# Altium PCB KOSVT-1.PcbDoc (part 1 of 2)
Units mm, origin at the board's own origin, x right, y up, seen from the top; angles counter-clockwise.
Board outline 70 x 45 mm, 4 copper layers (Top Layer, Layer 1, Layer 2, Bottom Layer), stack 1.051 mm thick; 90 components, 60 nets, 303 pads, 297 vias.
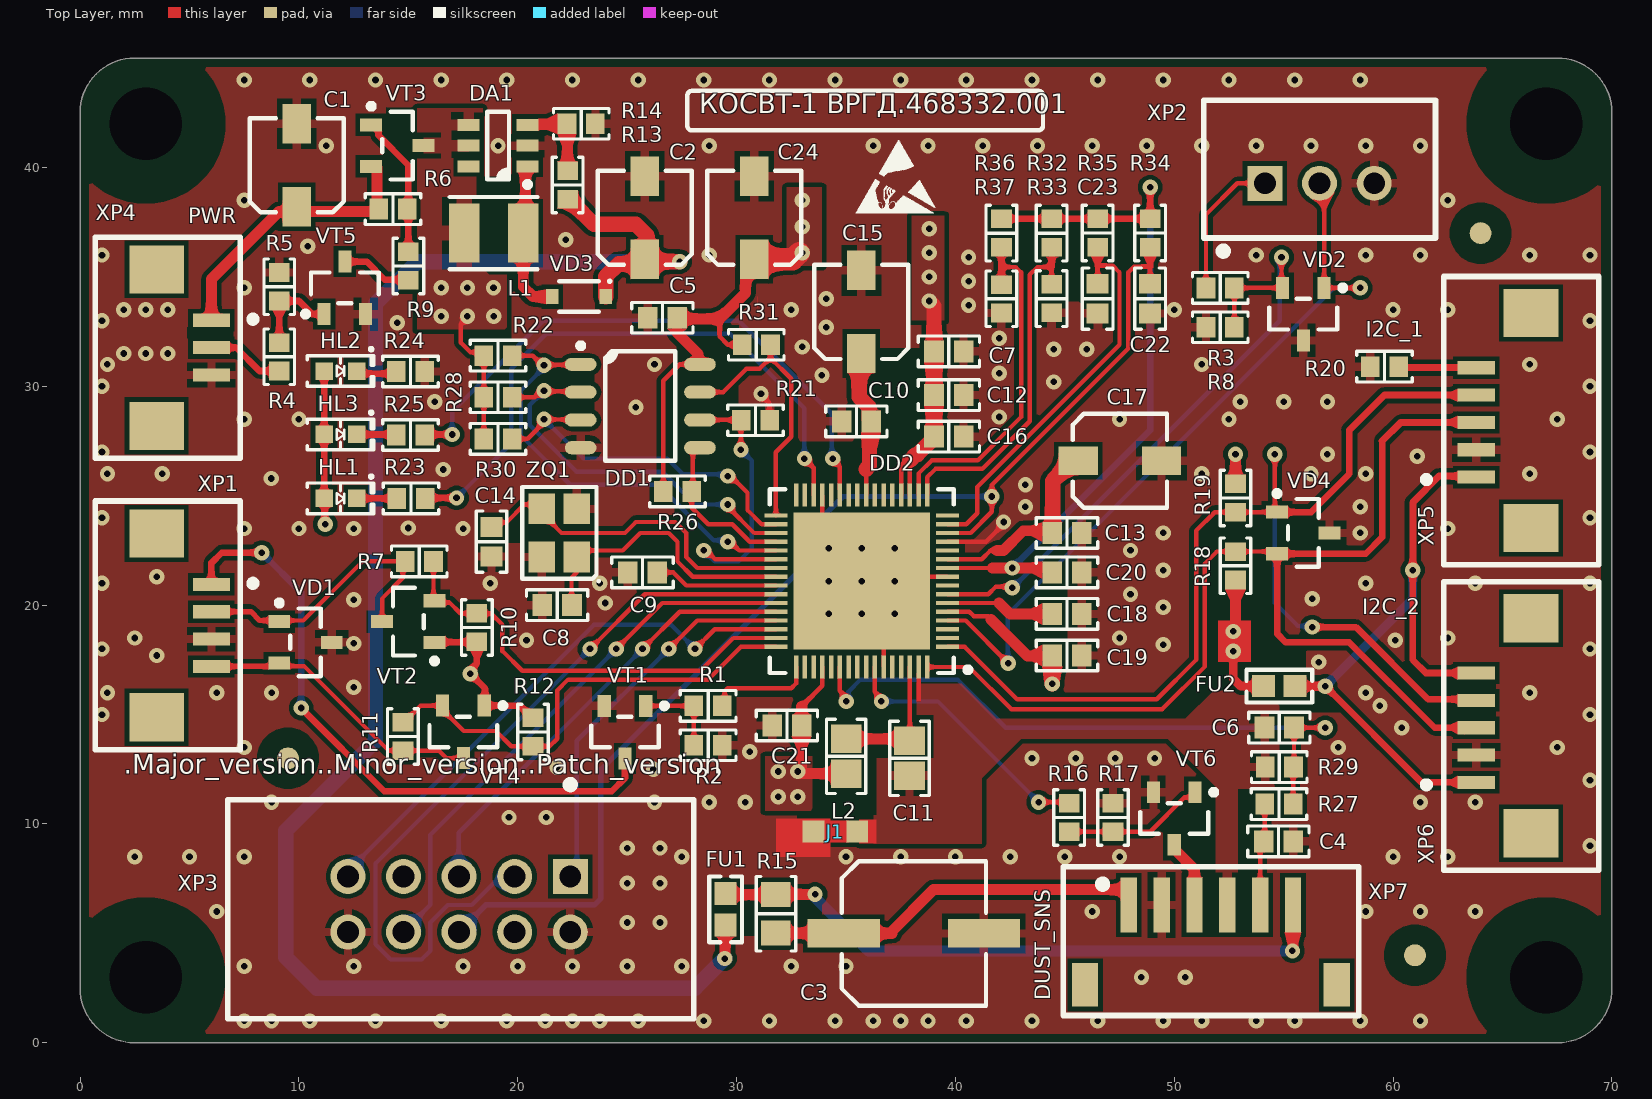
[diagram p0: Top Layer view]
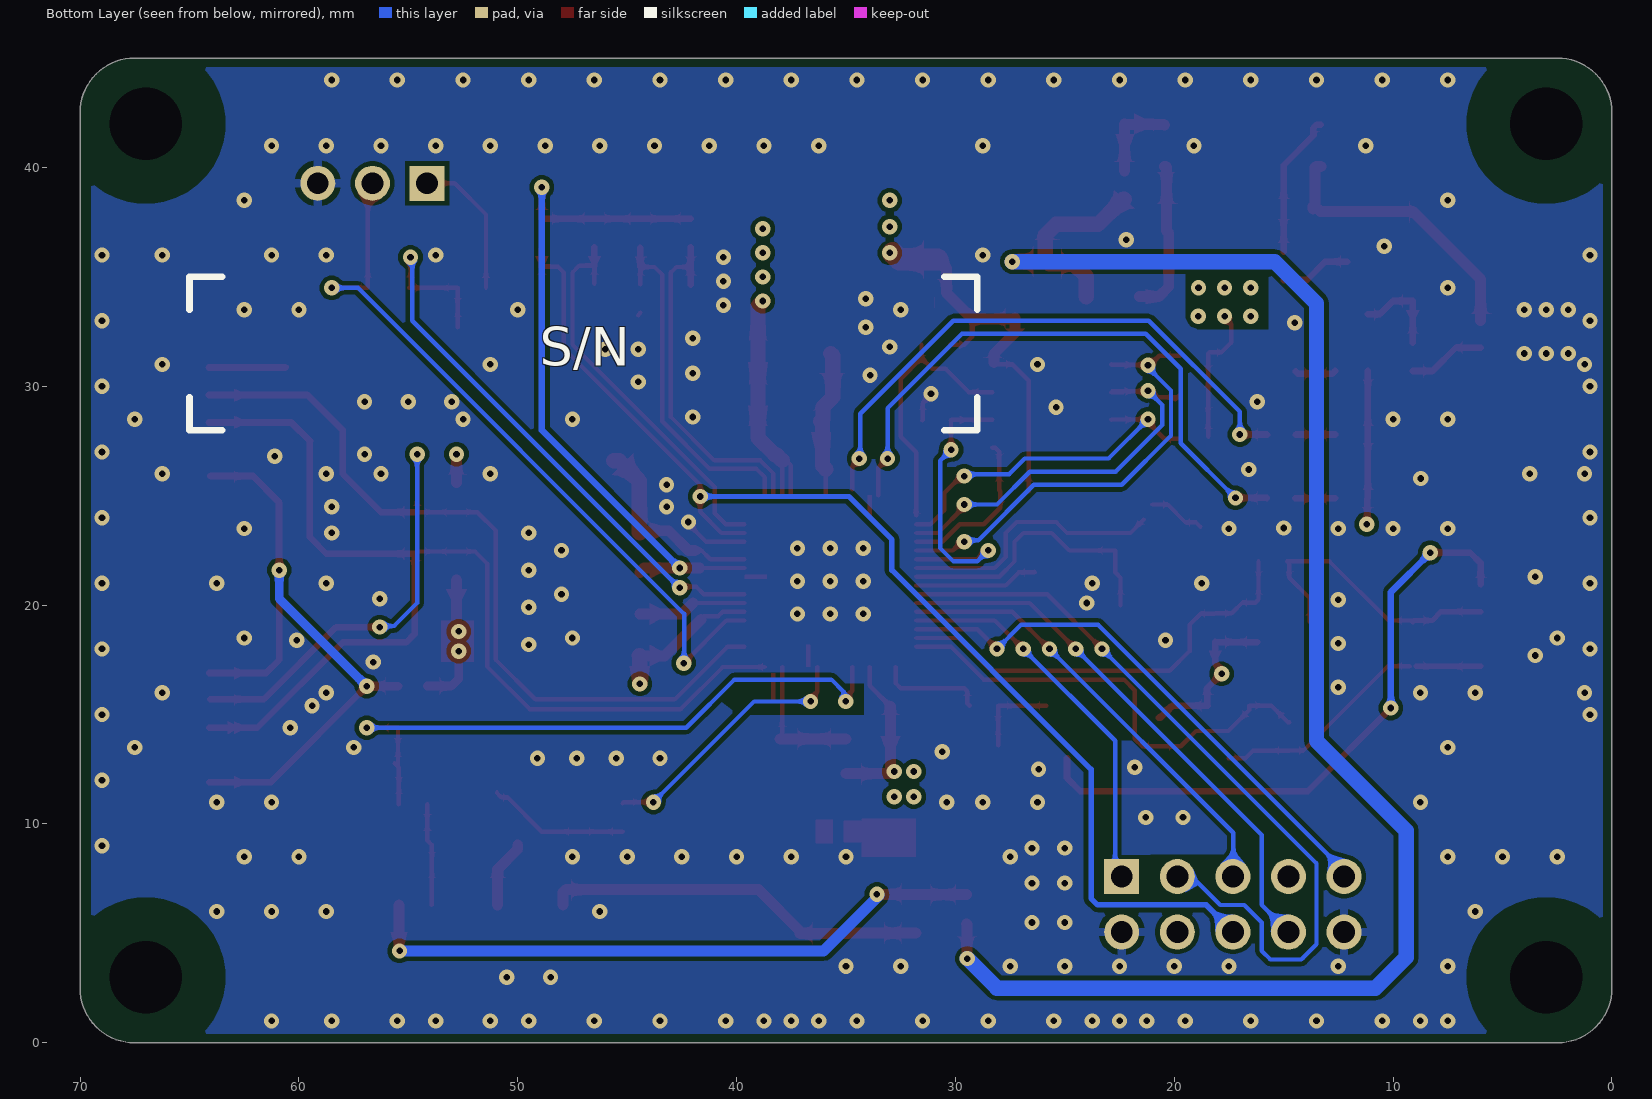
[diagram p1: Bottom Layer view, seen from below]
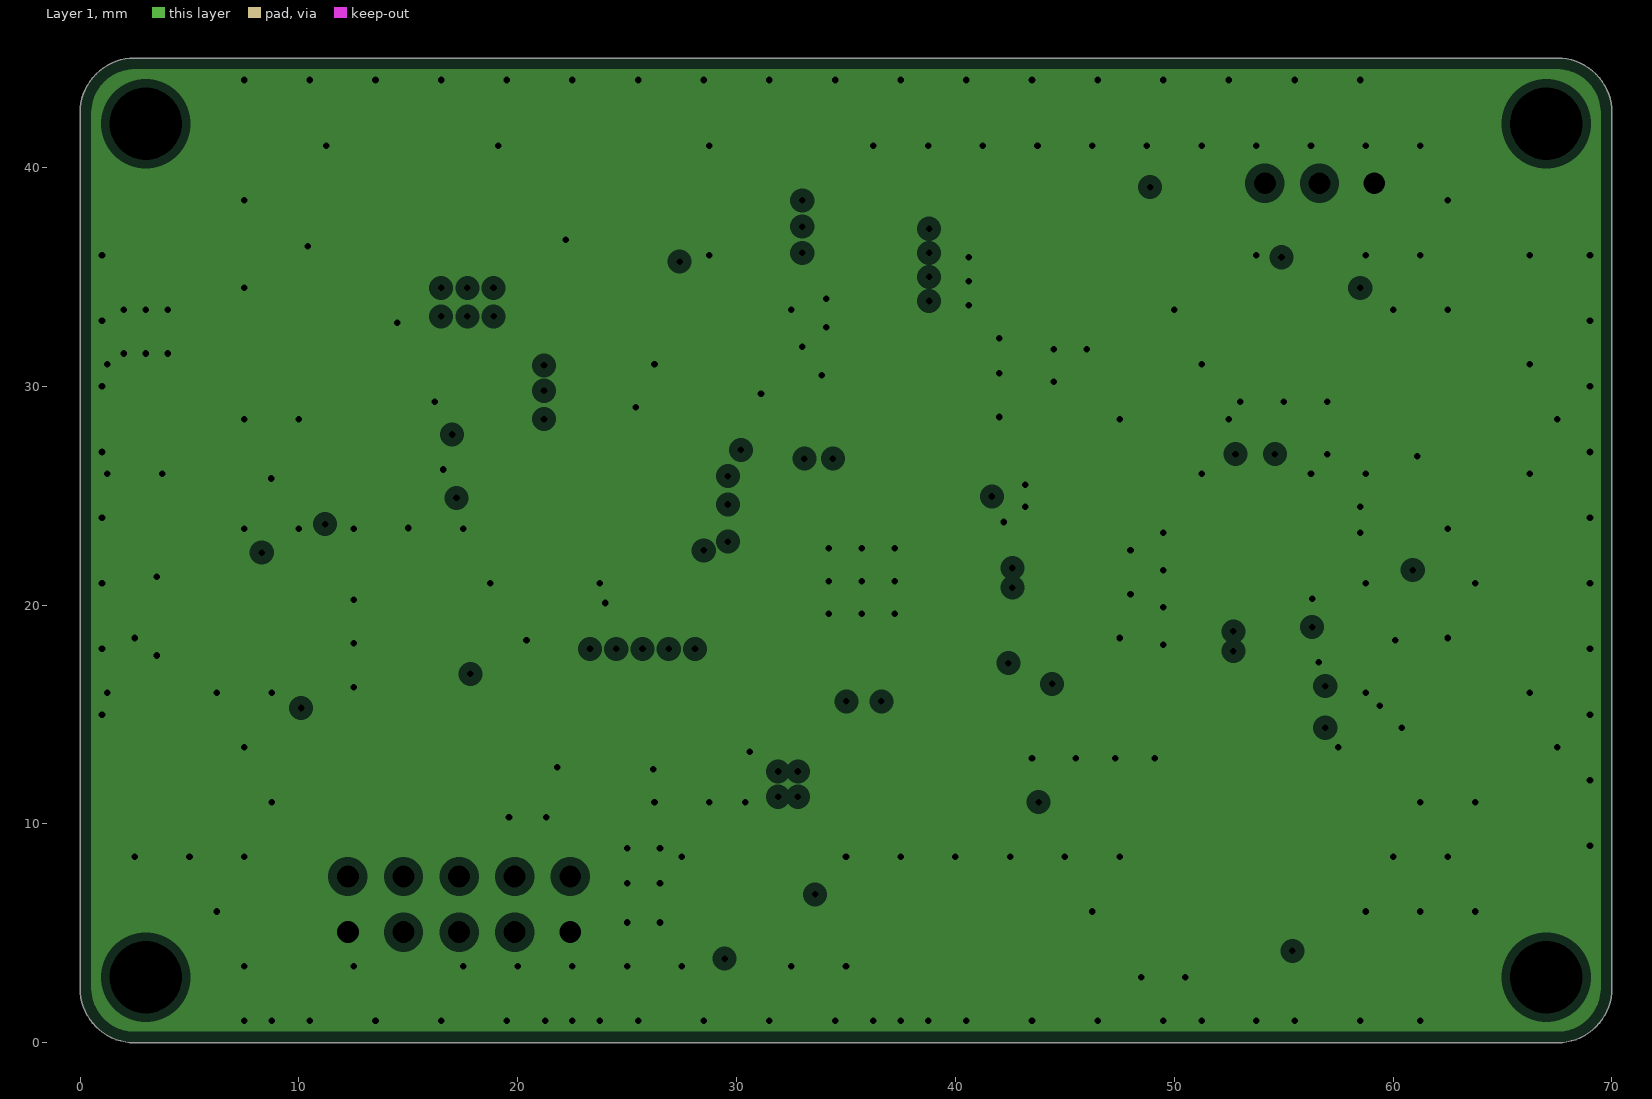
[diagram p2: Layer 1, clearances drawn from the general rule]
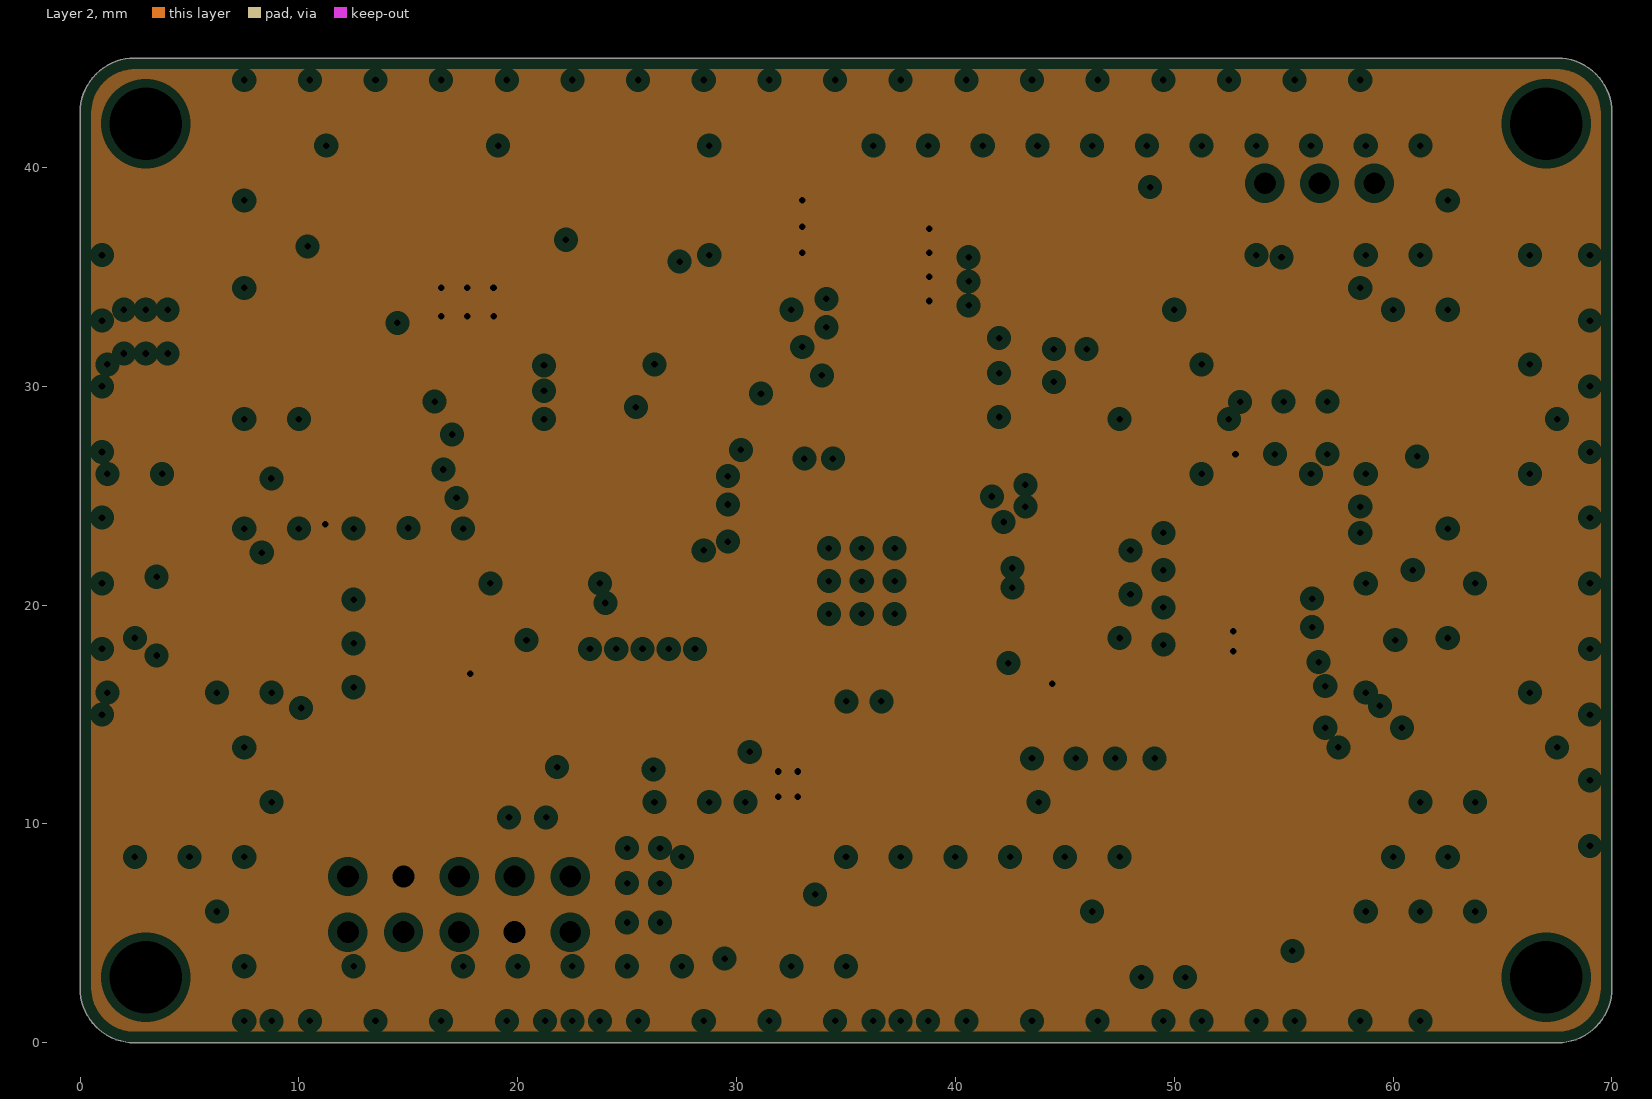
[diagram p3: Layer 2, clearances drawn from the general rule]
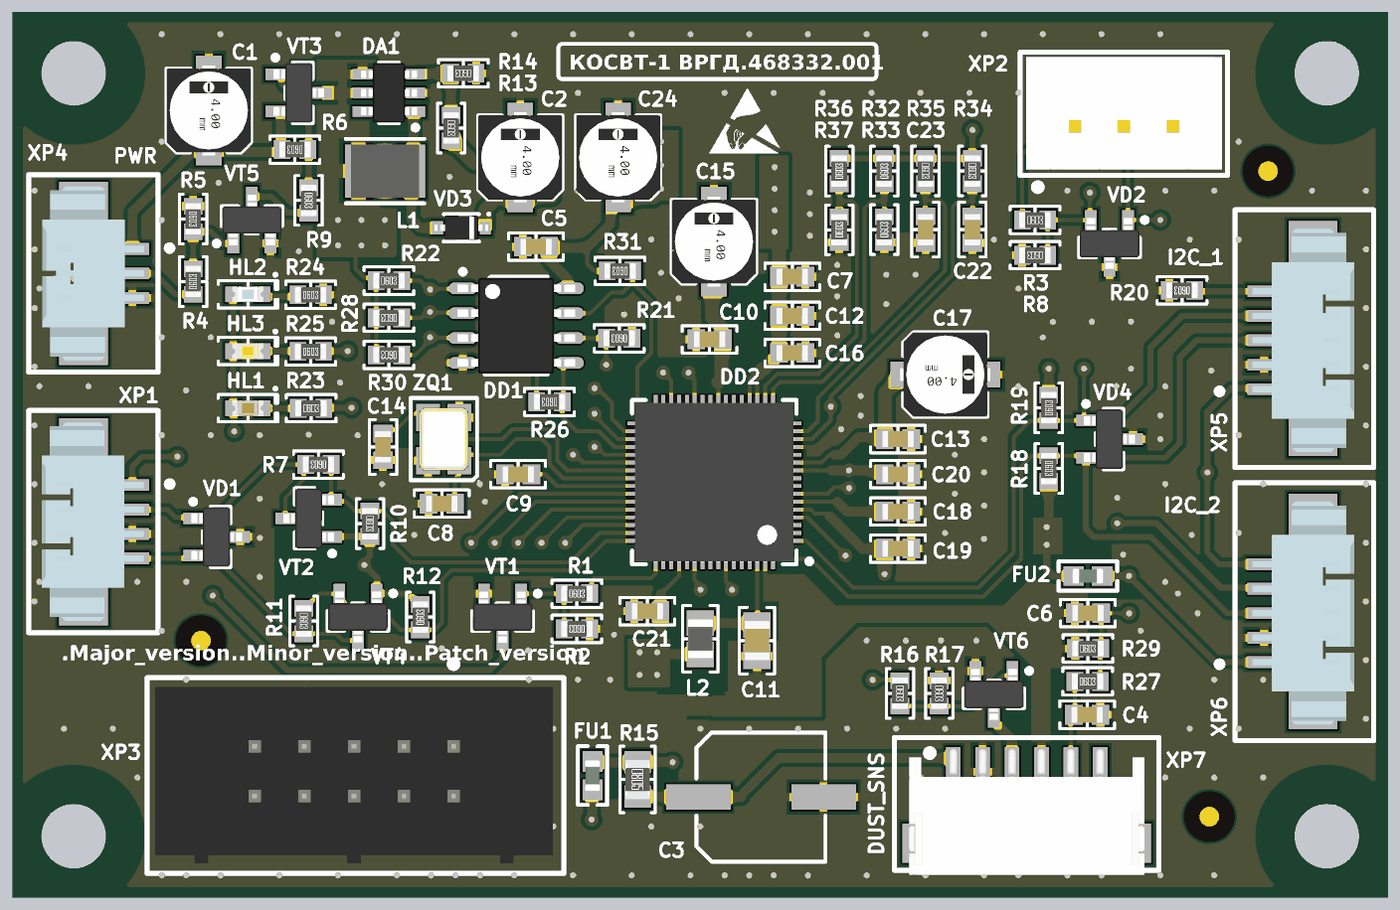
[diagram p4: 3D render of the assembled board from above, using the file's embedded part models]

## Layer stack, top to bottom
Top Solder: solder mask 0.0254, SM-001, Dk 4
Top Layer: signal copper 0.038
Dielectric 4: prepreg 0.115, FR4, Dk 4.2
Layer 1: plane copper 0.0175, net GND
Dielectric 1: core 0.71, FR4, Dk 4.6
Layer 2: plane copper 0.0175, net +3V3
Dielectric 5: prepreg 0.115, FR4, Dk 4.2
Bottom Layer: signal copper 0.038
Bottom Solder: solder mask 0.0254, SM-001, Dk 4

## Board outline
2.5,0 cw(c2.5,2.5) 0,2.5 0,42.5 cw(c2.5,42.5) 2.5,45 67.5,45 cw(c67.5,42.5) 70,42.5 70,2.5 cw(c67.5,2.5) 67.5,0

## Design rules (kind name [scope] priority, off if disabled: settings)
BoardOutlineClearance [All] p1: gap=0.4 ignorepadtopadclearanceinfootprint=FALSE
Clearance Clearance_RP [Name = 'Free-RP'] p1: gap=0.9 ignorepadtopadclearanceinfootprint=FALSE
Clearance Clearance_MH [Name = 'Free-MH'] p2: gap=2 ignorepadtopadclearanceinfootprint=FALSE
Clearance [All] p3: gap=0.2 ignorepadtopadclearanceinfootprint=FALSE
ComponentClearance [All] p1: gap=0.5 collisioncheckmode=3 verticalgap=0.254 showdistances=FALSE
HoleSize [All] p1: absolutevalues=TRUE maxlimit=5 minlimit=0.025 maxpercent=80.000 minpercent=20.000
MinimumSolderMaskSliver [All] p1: minsoldermaskwidth=0.05
PlaneClearance [Name = 'Free-MH'] p1: clearance=2
PlaneClearance PlaneClearance_All [All] p2: clearance=0.4
PlaneConnect [All] p1: pad.planeconnectstyle=Relief pad.reliefexpansion=0.508 pad.reliefentries=4 pad.reliefconductorwidth=0.254 pad.reliefairgap=0.254 via.planeconnectstyle=Direct via.reliefexpansion=0.508 via.reliefentries=4 via.reliefconductorwidth=0.254 via.reliefairgap=0.254
PolygonConnect PolygonConnect_3V3_1 [InNet('+3V3') vs InComponent('DA1')] p1: thpad.connectstyle=Relief thpad.reliefconductorwidth=0.5 thpad.reliefentries=4 thpad.polygonreliefangle="90 Angle" thpad.airgapwidth=0.3 smdpad.connectstyle=Relief smdpad.reliefconductorwidth=0.5 smdpad.reliefentries=4 smdpad.polygonreliefangle="90 Angle" smdpad.airgapwidth=0.3 via.connectstyle=Direct via.reliefconductorwidth=0.254 via.reliefentries=4 via.polygonreliefangle="90 Angle" via.airgapwidth=0.254
PolygonConnect PolygonConnect_3V3 [InNet('+3V3')] p2: thpad.connectstyle=Relief thpad.reliefconductorwidth=0.5 thpad.reliefentries=4 thpad.polygonreliefangle="90 Angle" thpad.airgapwidth=0.3 smdpad.connectstyle=Relief smdpad.reliefconductorwidth=0.7 smdpad.reliefentries=4 smdpad.polygonreliefangle="90 Angle" smdpad.airgapwidth=0.3 via.connectstyle=Direct via.reliefconductorwidth=0.254 via.reliefentries=4 via.polygonreliefangle="90 Angle" via.airgapwidth=0.254
PolygonConnect PolygonConnect_AGND [InNet('AGND')] p3: thpad.connectstyle=Relief thpad.reliefconductorwidth=0.4 thpad.reliefentries=4 thpad.polygonreliefangle="90 Angle" thpad.airgapwidth=0.25 smdpad.connectstyle=Relief smdpad.reliefconductorwidth=0.4 smdpad.reliefentries=4 smdpad.polygonreliefangle="90 Angle" smdpad.airgapwidth=0.25 via.connectstyle=Direct via.reliefconductorwidth=0.254 via.reliefentries=4 via.polygonreliefangle="90 Angle" via.airgapwidth=0.254
PolygonConnect [All] p4: thpad.connectstyle=Relief thpad.reliefconductorwidth=0.4 thpad.reliefentries=4 thpad.polygonreliefangle="90 Angle" thpad.airgapwidth=0.25 smdpad.connectstyle=Relief smdpad.reliefconductorwidth=0.4 smdpad.reliefentries=4 smdpad.polygonreliefangle="90 Angle" smdpad.airgapwidth=0.25 via.connectstyle=Direct via.reliefconductorwidth=0.254 via.reliefentries=4 via.polygonreliefangle="90 Angle" via.airgapwidth=0.254
RoutingVias [All] p1: holewidth=0.3 width=1.2 viastyle="Through Hole" minholewidth=0.2 minwidth=0.6 maxholewidth=0.5 maxwidth=1
SilkToSilkClearance [All] p1: silktosilkclearance=0.2
SilkToSolderMaskClearance [IsPad] p1: minsilkscreentomaskgap=0.05 clearancetoexposedcopper=TRUE
SolderMaskExpansion [All] p1: expansion=0.102 istentingtop=FALSE
SupplyNets "Schematic Supply Nets_6" [InNet('VCC_BU')] p1: voltage=0.000
SupplyNets "Schematic Supply Nets_5" [InNet('GND')] p2: voltage=0.000
SupplyNets "Schematic Supply Nets_4" [InNet('+5V_Fus')] p3: voltage=0.000
SupplyNets "Schematic Supply Nets_3" [InNet('AGND')] p4: voltage=0.000
SupplyNets "Schematic Supply Nets_2" [InNet('+3V3_Fus')] p5: voltage=0.000
SupplyNets "Schematic Supply Nets_1" [InNet('+3V3')] p6: voltage=0.000
SupplyNets "Schematic Supply Nets" [InNet('+5V')] p7: voltage=0.000
Width [All] p1: maxlimit=1 minlimit=0.15 preferedwidth=0.2
23 further rules are at their usual default settings.

## Classes and differential pairs
component class MCU: C5 C6 C7 C8 C9 C10 C11 C12 C13 C14 C15 C16 C17 C18 C19 C20 C21 C22 C23 C24 DD1 DD2 HL1 HL2 HL3 J1 L2 R21 R22 R23 R24 R25 R26 R27 R28 R29 R30 R31 R32 R33 R34 R35 R36 R37 ZQ1
component class MAIN: C1 C2 C3 C4 DA1 FU1 FU2 L1 R1 R2 R3 R4 R5 R6 R7 R8 R9 R10 R11 R12 R13 R14 R15 R16 R17 R18 R19 R20 VD1 VD2 VD3 VD4 VT1 VT2 VT3 VT4 VT5 VT6 XP1 XP2 XP3 XP4 XP5 XP6 XP7

## Components (designator, comment, footprint, x,y, rotation, side; value= is the part's Value field where it differs from the comment)
C1 "10uF" "CAP ALSMD ELEC 4.3MM H5.4MM" 9.9,40.101 r90 top
C2 "22uF" "CAP ALSMD ELEC 4.3MM H5.4MM" 25.806,37.7 r90 top
C3 "220uF" "CAP ALSMD ELEC 6.6MM H7.7MM" 38.1,5 r0 top
C4 "10nF" "CAP 0603_1608" 54.76,9.206 r180 top
C5 "0.1uF" "CAP 0603_1608" 26.612,33.134 r0 top
C6 "10nF" "CAP 0603_1608" 54.8,14.404 r0 top
C7 "0.1uF" "CAP 0603_1608" 39.7,31.6 r180 top
C8 "10pF" "CAP 0603_1608" 21.8,20 r0 top
C9 "0.1uF" "CAP 0603_1608" 25.7,21.5 r0 top
C10 "0.1uF" "CAP 0603_1608" 35.475,28.4 r0 top
C11 "1uF" "CAP 0805_2012" 37.9,13 r90 top
C12 "0.1uF" "CAP 0603_1608" 39.7,29.6 r180 top
C13 "0.1uF" "CAP 0603_1608" 45.1,23.3 r180 top
C14 "10pF" "CAP 0603_1608" 18.8,22.9 r90 top
C15 "2.2uF" "CAP ALSMD ELEC 4.3MM H5.4MM" 35.7,33.4 r90 top
C16 "0.1uF" "CAP 0603_1608" 39.7,27.7 r180 top
C17 "2.2uF" "CAP ALSMD ELEC 4.3MM H5.4MM" 47.518,26.6 r0 top
C18 "0.1uF" "CAP 0603_1608" 45.1,19.6 r180 top
C19 "0.1uF" "CAP 0603_1608" 45.1,17.7 r180 top
C20 "0.1uF" "CAP 0603_1608" 45.1,21.5 r180 top
C21 "0.1uF" "CAP 0603_1608" 32.3,14.5 r0 top
C22 "0.1uF" "CAP 0603_1608" 48.9,34.006 r90 top
C23 "0.1uF" "CAP 0603_1608" 46.5,34.006 r90 top
C24 "10uF" "CAP ALSMD ELEC 4.3MM H5.4MM" 30.806,37.7 r90 top
DA1 "MT3608 AEROSEMI" "TI SOT-23-6 DBV" 19.1,41 r180 top
DD1 "W25Q16JVSNIQ" "WINBOND SOIC-8" 25.6,29.1 r0 top
DD2 "К1948ВК018 АДКБ.431290.418ТУ" QFN40P800X800X76_HS-65M 35.718,21.1 r180 top
FU1 "BSMD0603-010-15V BHFUSE" "FUSE 0603_1608 0.8MM" 29.5,6.1 r90 top
FU2 "BSMD0603-010-15V BHFUSE" "FUSE 0603_1608 0.8MM" 54.8,16.3 r0 top
HL1 "KP-1608SURC" "LED 0603_1608 RED" 11.9,24.878 r0 top
HL2 "KPH-1608MGC" "LED 0603_1608 GREEN" 11.9,30.7 r0 top
HL3 "KPH-1608SYC" "LED 0603_1608 YELLOW" 11.9,27.8 r0 top
J1 "=Value" NET_TIE_1MM 35.516,9.654 r180 top net-tie
L1 "10uH" "MURATA LQH32CN" 18.9,37 r0 top
L2 "220ohm 100MHz" "FER 0805_2012" 35.004,13.091 r270 top
R1 "1.2k" "RES 0603_1608"#1 28.7,15.4 r0 top
R2 "10k" "RES 0603_1608"#1 28.7,13.6 r180 top
R3 "1.2k" "RES 0603_1608"#1 52.1,34.5 r0 top
R4 "1.2k" "RES 0603_1608"#1 9.1,31.35 r90 top
R5 "10k" "RES 0603_1608"#1 9.1,34.55 r270 top
R6 "10k" "RES 0603_1608"#1 14.3,38.1 r180 top
R7 "0" "RES 0603_1608"#1 15.5,22 r180 top
R8 "2k" "RES 0603_1608"#1 52.1,32.7 r180 top
R9 "10" "RES 0603_1608"#1 15,35.5 r270 top
R10 "4.7k" "RES 0603_1608"#1 18.13,18.978 r270 top
R11 "0" "RES 0603_1608"#1 14.75,14 r270 top
R12 "4.7k" "RES 0603_1608"#1 20.7,14.2 r90 top
R13 "11k" "RES 0603_1608"#1 22.28,39.2 r270 top
R14 "1.5k" "RES 0603_1608"#1 22.9,42 r180 top
R15 "150" "RES 0805_2012" 31.8,5.9 r270 top
R16 "10" "RES 0603_1608"#1 45.2,10.3 r270 top
R17 "" "RES 0603_1608"#1 47.204,10.3 r270 top value=10k
R18 "4.7k" "RES 0603_1608"#1 52.8,21.8 r270 top
R19 "4.7k" "RES 0603_1608"#1 52.8,24.9 r90 top
R20 "10k" "RES 0603_1608"#1 59.606,30.9 r180 top
R21 "10k" "RES 0603_1608"#1 30.863,28.451 r180 top
R22 "10k" "RES 0603_1608"#1 19.1,31.4 r0 top
R23 "470" "RES 0603_1608"#2 15.124,24.878 r0 top
R24 "470" "RES 0603_1608"#2 15.102,30.678 r0 top
R25 "470" "RES 0603_1608"#2 15.102,27.778 r0 top
R26 "10k" "RES 0603_1608"#1 27.3,25.2 r180 top
R27 "4.7k" "RES 0603_1608"#1 54.785,10.91 r0 top
R28 "10k" "RES 0603_1608"#1 19.1,29.5 r180 top
R29 "1.2k" "RES 0603_1608"#1 54.8,12.6 r0 top
R30 "10k" "RES 0603_1608"#1 19.1,27.6 r180 top
R31 "10k" "RES 0603_1608"#1 30.9,31.9 r180 top
R32 "10k" "RES 0603_1608"#1 44.4,37 r90 top
R33 "10k" "RES 0603_1608"#1 44.4,34.006 r90 top
R34 "10k" "RES 0603_1608"#1 48.9,37.006 r270 top
R35 "10k" "RES 0603_1608"#1 46.5,37.006 r270 top
R36 "10k" "RES 0603_1608"#1 42.1,37 r90 top
R37 "10k" "RES 0603_1608"#1 42.1,34 r90 top
VD1 "PESD5V0U1UT" "SOT-23-3 N" 10.3,18.3 r0 top
VD2 "PESD5V0U1UT" "SOT-23-3 N" 55.9,33.3 r270 top
VD3 "1N5817WS Hottech" "MCC SOD-323" 22.8,34.1 r0 top
VD4 "PESD5V0U1UT" "SOT-23-3 N" 55.9,23.3 r0 top
VT1 "КТ229Б9" "SOT-23-3 N" 24.9,14.2 r270 top
VT2 "КП526А9" "SOT-23-3 N" 15,19.25 r180 top
VT3 "AO3401 Hottech" "SOT-23-3 N" 14.5,41 r0 top
VT4 "КП526А9" "SOT-23-3 N" 17.519,14.208 r270 top
VT5 "КТ229Б9" "SOT-23-3 N" 12.1,34.5 r90 top
VT6 "КП526А9" "SOT-23-3 N" 50,10.25 r270 top
XP1 "DS1020-02-04MVT1R" DS1020-02-04MVT1R 6,20.95 r270 top locked
XP2 "DS1069-3MVW6X" CONNFLY_DS1069-3M 54.139,39.279 r0 top
XP3 "DS1013-10S" DS1013-10S 22.4,7.6 r0 top
XP4 "DS1020-02-03MVT1R" DS1020-02-03MVT1R 6,33.018 r270 top locked
XP5 "DS1020-02-05MVT1R" DS1020-02-05MVT1R 63.8,25.85 r90 top
XP6 "DS1020-02-05MVT1R" DS1020-02-05MVT1R 63.8,11.9 r90 top
XP7 "S6B-ZR-SM4A-TF" "JST S6B-ZR-SM4A-TF" 57.425,2.65 r180 top
ZQ1 "32MHz" XTAL3225X07N 21.9,23.3 r90 top

## Footprints (in the part's own frame and the unit in brackets; to place one, negate y for a bottom-side part, rotate by r counter-clockwise, add the part's x,y. Pads: shape width x height; smd on the part's side, far side on the other; paste and mask are expansions set on the pad)
"CAP 0603_1608" [mm] "Chip Capacitor, 2-Leads, Body 1.60x0.80mm, IPC Medium Density"
  rect 0.9x1 smd: 1(-0.675,0) 2(0.675,0)
  silkscreen extent -1.4,-0.7 1.4,0.7, body extent -0.8,-0.41 0.8,0.41, height 0.82
"CAP 0805_2012" [mm] "Chip Capacitor, 2-Leads, Body 2.00x1.20mm, IPC Medium Density"
  rect 1.3x1.4 smd: 1(-0.8,0) 2(0.8,0)
  silkscreen extent -1.7,-0.9 1.7,0.9, body extent -1,-0.64 1,0.64, height 1.26
"CAP ALSMD ELEC 4.3MM H5.4MM" [mm] "Aluminum SMD Electrolytic Capacitor, 4.30mm Land Size, 4.00mm Diameter, 5.40mm Height, 4.60mm Maximum Leads Span"
  rect 1.8x1.3 smd: 1(-1.9,0) 2(1.9,0)
  silkscreen extent -2.15,-2.15 2.15,2.15, body extent -2.3,-2.15 2.3,2.15, height 5.4
"CAP ALSMD ELEC 6.6MM H7.7MM" [mm] "Aluminum SMD Electrolytic Capacitor, 6.60mm Land Size, 6.30mm Diameter, 7.70mm Height, 8.00mm Maximum Leads Span"
  rect 3.3x1.3 smd: 1(-3.2,0) 2(3.2,0)
  silkscreen extent -3.3,-3.3 3.3,3.3, body extent -4,-3.3 4,3.3, height 7.7
CONNFLY_DS1069-3M [mm]
  rect 1.6x1.6 hole 1: 1(0,0)
  round 1.6 hole 1: 2(2.5,0) 3(5,0)
  silkscreen extent -2.8,-3.25 7.8,3.8, body extent -2.5,-2.2 7.5,3.55, height 7
DS1013-10S [mm]
  rect 1.6x1.6 hole 1: 1(0,0)
  round 1.6 hole 1: 2(0,-2.54) 3(-2.54,0) 4(-2.54,-2.54) 5(-5.08,0) 6(-5.08,-2.54) 7(-7.62,0) 8(-7.62,-2.54) 9(-10.16,0) 10(-10.16,-2.54)
  silkscreen extent -15.66,-6.5 5.64,4.35, body extent -15.23,-5.98 5.07,3.02, height 8.9
DS1020-02-03MVT1R [mm]
  rect 0.6x1.7 smd: 1(0,0) 2(1.25,0) 3(2.5,0)
  rect 2.2x2.5 smd: M(-2.325,-2.5) M(4.825,-2.5)
  silkscreen extent -3.8,-5.3 6.3,2, body extent -3.2,-4.6 5.7,0.6, height 3.4
DS1020-02-04MVT1R [mm]
  rect 0.6x1.7 smd: 1(0,0) 2(1.25,0) 3(2.5,0) 4(3.75,0)
  rect 2.2x2.5 smd: M(-2.325,-2.5) M(6.075,-2.5)
  silkscreen extent -3.81,-5.3 7.55,2, body extent -3.2,-4.62 6.95,0.58, height 3.35
DS1020-02-05MVT1R [mm]
  rect 0.6x1.7 smd: 1(0,0) 2(1.25,0) 3(2.5,0) 4(3.75,0) 5(5,0)
  rect 2.2x2.5 smd: M(-2.325,-2.5) M(7.5,-2.5)
  silkscreen extent -4.01,-5.6 9.17,2.38, body extent -3.2,-4.6 8.2,0.6, height 3.35
"FER 0805_2012" [mm] "Chip Ferrite, 2-Leads, Body 2.00x1.20mm, IPC Medium Density"
  rect 1.3x1.4 smd: 1(-0.8,0) 2(0.8,0)
  silkscreen extent -1.7,-0.9 1.7,0.9, body extent -1,-0.64 1,0.64, height 1.26
"FUSE 0603_1608 0.8MM" [mm] "Chip Fuse 1.5A AC 32V DC, 2-Leads, Body 1.60x0.80mm, IPC Medium Density"
  rect 1.05x1 smd: 1(-0.725,0) 2(0.725,0)
  silkscreen extent -1.5,-0.75 1.5,0.75, body extent -0.8,-0.4 0.8,0.4, height 0.95
"JST S6B-ZR-SM4A-TF" [mm]
  rect 0.75x2.5 smd: 1(9.5,-3.65) 2(8,-3.65) 3(6.5,-3.65) 4(5,-3.65) 5(3.5,-3.65) 6(2,-3.65)
  rect 1.2x2 smd: M(0,0) M(11.5,0)
  silkscreen extent -1,-5.4 12.5,1.4, body extent -0.25,-4.88 11.75,1.62, height 3.7
"LED 0603_1608 GREEN" [mm] "Chip Diode, 2-Leads, Body 1.60x0.80mm, IPC Medium Density"
  rect 0.8x0.8 smd: 1(-0.75,0) 2(0.75,0)
  silkscreen extent -1.52,-0.7 1.52,1.05, body extent -0.8,-0.4 0.8,0.4, height 0.53
"LED 0603_1608 RED" [mm] "Chip Diode, 2-Leads, Body 1.60x0.80mm, IPC Medium Density"
  rect 0.8x0.8 smd: 1(-0.75,0) 2(0.75,0)
  silkscreen extent -1.52,-0.7 1.52,1.05, body extent -0.8,-0.4 0.8,0.4, height 0.53
"LED 0603_1608 YELLOW" [mm] "Chip Diode, 2-Leads, Body 1.60x0.80mm, IPC Medium Density"
  rect 0.8x0.8 smd: 1(-0.75,0) 2(0.75,0)
  silkscreen extent -1.52,-0.7 1.52,1.05, body extent -0.8,-0.4 0.8,0.4, height 0.53
"MCC SOD-323" [mm] "SOD-323, 2-Leads, Body 1.70x1.25mm"
  rect 0.56x0.69 smd: 1(-1.22,0) 2(1.22,0)
  silkscreen extent -0.9,-0.7 1.45,0.75, body extent -1.36,-0.63 1.36,0.63, height 1.2
"MURATA LQH32CN" [mm]
  rect 1.4x2.7 smd: 1(-1.35,0) 2(1.35,0)
  silkscreen extent -2,-1.65 2,1.65, body extent -1.75,-1.45 1.75,1.45, height 2.21
NET_TIE_1MM [mm]
  rect 1x1 smd paste-2539.97 mask-2539.97: 1(0,0)
  rect 1x1 smd paste-2539.97 mask+0.102: 2(2,0)
  Top Layer region: 0.4,-0.5 1.6,-0.5 1.6,0.5 0.4,0.5
QFN40P800X800X76_HS-65M [mm] "QFN, 64-Leads, Body 8,00x8,00mm, Pitch 0,40mm, Thermal Pad 6,25x6,25mm, IPC Low Density"
  rect 1.05x0.2 smd: 1(-3.925,3) 2(-3.925,2.6) 3(-3.925,2.2) 4(-3.925,1.8) 5(-3.925,1.4) 6(-3.925,1) 7(-3.925,0.6) 8(-3.925,0.2) 9(-3.925,-0.2) 10(-3.925,-0.6) 11(-3.925,-1) 12(-3.925,-1.4) 13(-3.925,-1.8) 14(-3.925,-2.2) 15(-3.925,-2.6) 16(-3.925,-3) 33(3.925,-3) 34(3.925,-2.6) 35(3.925,-2.2) 36(3.925,-1.8) 37(3.925,-1.4) 38(3.925,-1) 39(3.925,-0.6) 40(3.925,-0.2) 41(3.925,0.2) 42(3.925,0.6) 43(3.925,1) 44(3.925,1.4) 45(3.925,1.8) 46(3.925,2.2) 47(3.925,2.6) 48(3.925,3)
  rect 0.2x1.05 smd: 17(-3,-3.925) 18(-2.6,-3.925) 19(-2.2,-3.925) 20(-1.8,-3.925) 21(-1.4,-3.925) 22(-1,-3.925) 23(-0.6,-3.925) 24(-0.2,-3.925) 25(0.2,-3.925) 26(0.6,-3.925) 29(1.8,-3.925) 31(2.6,-3.925) 32(3,-3.925) 49(3,3.925) 50(2.6,3.925) 51(2.2,3.925) 52(1.8,3.925) 53(1.4,3.925) 54(1,3.925) 55(0.6,3.925) 56(0.2,3.925) 57(-0.2,3.925) 58(-0.6,3.925) 59(-1,3.925) 60(-1.4,3.925) 61(-1.8,3.925) 62(-2.2,3.925) 63(-2.6,3.925) 64(-3,3.925)
  rect 0.2x1.05 smd mask+0.102: 27(1,-3.925) 28(1.4,-3.925) 30(2.2,-3.925)
  rect 6.25x6.25 smd: 65(0,0)
  silkscreen extent -4.98,-4.2 4.2,4.2, body extent -4.06,-4.06 4.06,4.06, height 0.76
"RES 0603_1608"#1 [mm] "Chip Resistor, 2-Leads, Body 1.60x0.80mm, IPC Medium Density"
  rect 0.85x0.95 smd: 1(-0.65,0) 2(0.65,0)
  silkscreen extent -1.27,-0.7 1.27,0.7, body extent -0.8,-0.4 0.8,0.4, height 0.45
"RES 0603_1608"#2 [mm] "Chip Resistor, 2-Leads, Body 1.60x0.80mm, IPC Medium Density"
  rect 0.85x0.95 smd: 1(-0.65,0)
  rect 0.85x0.95 smd mask+0.102: 2(0.65,0)
  silkscreen extent -1.27,-0.7 1.27,0.7, body extent -0.8,-0.4 0.8,0.4, height 0.45
"RES 0805_2012" [mm] "Chip Resistor, 2-Leads, Body 2.00x1.25mm, IPC Medium Density"
  rect 1.15x1.35 smd: 1(-0.875,0) 2(0.875,0)
  silkscreen extent -1.7,-0.9 1.7,0.9, body extent -1,-0.62 1,0.63, height 0.6
"SOT-23-3 N" [mm] "SOT23, 3-Leads, Body 2,93x2,45mm, Pitch 0,95mm, IPC Medium Density"
  rect 1x0.6 smd: 1(-1.2,0.95) 2(-1.2,-0.95) 3(1.2,0)
  silkscreen extent -1.32,-1.55 0.7,1.92, body extent -1.3,-1.53 1.3,1.53, height 1.11
"TI SOT-23-6 DBV" [mm] "SOT23, 6-Leads, Body 2.90x2.80mm, Pitch 0.95mm, IPC Medium Density"
  rect 1x0.55 smd: 1(-1.35,0.95) 2(-1.35,0) 3(-1.35,-0.95) 4(1.35,-0.95) 5(1.35,0) 6(1.35,0.95)
  silkscreen extent -1.48,-1.55 0.5,1.9, body extent -1.44,-1.53 1.44,1.52, height 1.45
"WINBOND SOIC-8" [mm] "SOIC, 8-Leads, Body 4.90x3.90mm, Pitch 1.27mm, IPC Medium Density"
  oval 1.45x0.6 smd: 1(-2.725,1.905) 2(-2.725,0.635) 3(-2.725,-0.635) 4(-2.725,-1.905) 5(2.725,-1.905) 6(2.725,-0.635) 7(2.725,0.635) 8(2.725,1.905)
  silkscreen extent -2.85,-2.5 1.6,2.88, body extent -3.01,-2.45 3.01,2.45, height 1.5
XTAL3225X07N [mm] "Crystal, 4-Leads, Body 2.50x3.20mm, Pitch 2.20mm, IPC Medium Density"
  rect 1.4x1.2 smd: 1(-1.1,-0.8) 2(1.1,-0.8) 3(1.1,0.8) 4(-1.1,0.8)
  silkscreen extent -2.25,-1.85 2.1,1.7, body extent -1.61,-1.26 1.61,1.26, height 0.6

## Part data
C1 C24: library part "К50-97 – 25В – 10мкФ (±20) % – ЕВАЯ.673541.054ТУ", "Конденсатор К50-97 – 25В – 10мкФ (±20) % – ЕВАЯ.673541.054ТУ", Dielectric type=Electrolytic, Manufacturer="АО Элеконд", Package="SMD D4x5.4", Tolerance="± 20%", Voltage=25V, Country=Россия, Group="Конденсаторы полярные", HelpURL=https://elecond.ru/pdf/k50-97.pdf, Manufacturer Part Number="К50-97 – 25В – 10мкФ (±20) % – ЕВАЯ.673541.054ТУ", Name="К50-97 – 25В – 10мкФ (±20) % – ЕВАЯ.673541.054ТУ", Type="Конденсатор электролитический"
C2: library part "К50-97 – 16В – 22мкФ (±20) % – ЕВАЯ.673541.054ТУ", "Конденсатор К50-97 – 16В – 22мкФ (±20) % – ЕВАЯ.673541.054ТУ", Dielectric type=Electrolytic, Manufacturer="АО Элеконд", Package="SMD D4x5.4", Tolerance="± 20%", Voltage=16V, Country=Россия, Group="Конденсаторы полярные", HelpURL=https://elecond.ru/pdf/k50-97.pdf, Manufacturer Part Number="К50-97 – 16В – 22мкФ (±20) % – ЕВАЯ.673541.054ТУ", Name="К50-97 – 16В – 22мкФ (±20) % – ЕВАЯ.673541.054ТУ", Type="Конденсатор электролитический"
C3: library part "К50-97 – 16В – 220мкФ (±20) % – ЕВАЯ.673541.054ТУ", "Конденсатор К50-97 – 16В – 220мкФ (±20) % – ЕВАЯ.673541.054ТУ", Dielectric type=Electrolytic, Manufacturer="АО Элеконд", Package="SMD D6.3x7.7", Tolerance="± 20%", Voltage=16V, Country=Россия, Group="Конденсаторы полярные", HelpURL=https://elecond.ru/pdf/k50-97.pdf, Manufacturer Part Number="К50-97 – 16В – 220мкФ (±20) % – ЕВАЯ.673541.054ТУ", Name="К50-97 – 16В – 220мкФ (±20) % – ЕВАЯ.673541.054ТУ", Type="Конденсатор электролитический"
C4 C6: library part GRM188R71E103K, "Конденсатор 0603-X7R-25В-10мкФ ± 10%", Dielectric type=X7R, Manufacturer="Murata Electronics", Package=SMD0603, Tolerance="± 10%", Voltage=25V, Country=Япония, Group=Конденсаторы, Manufacturer Part Number=GRM188R71E103K, Name=GRM188R71E103K, Type="Конденсатор керамический"
C5 C7 C9 C10 C12 C13 C16 C18 C19 C20 C21 C22 C23: library part GRM188R71E104K, "Конденсатор 0603-X7R-25В-0,1мкФ ± 10%", Dielectric type=X7R, Manufacturer="Murata Electronics", Package=SMD0603, Tolerance="± 10%", Voltage=25V, Country=Япония, Group=Конденсаторы, Manufacturer Part Number=GRM188R71E104K, Name=GRM188R71E104K, Type="Конденсатор керамический"
C8 C14: library part CC0603KRNPO9BN100, "Конденсатор 0603-C0G-50В-10пФ ± 10%", Dielectric type=C0G, Manufacturer=Yageo, Package=SMD0603, Tolerance="± 10%", Voltage=50V, Country=Тайвань, Group=Конденсаторы, Manufacturer Part Number=CC0603KRNPO9BN100, Name=CC0603KRNPO9BN100, Type="Конденсатор керамический"
C11: library part GRM21BR71E105KA99L, "Конденсатор 0805-X7R-25В-1мкФ ± 10%", Dielectric type=X7R, Manufacturer="Murata Electronics", Package=SMD0805, Tolerance="± 10%", Voltage=25V, Country=Япония, Group=Конденсаторы, Manufacturer Part Number=GRM21BR71E105KA99L, Name=GRM21BR71E105KA99L, Type="Конденсатор керамический"
C15 C17: library part "К50-97 – 50В – 2,2мкФ (±20) % – ЕВАЯ.673541.054ТУ", "Конденсатор К50-97 – 50В – 2,2мкФ (±20) % – ЕВАЯ.673541.054ТУ", Dielectric type=Electrolytic, Manufacturer="АО Элеконд", Package="SMD D4x5.4", Tolerance="± 20%", Voltage=50V, Country=Россия, Group="Конденсаторы полярные", HelpURL=https://elecond.ru/pdf/k50-97.pdf, Manufacturer Part Number="К50-97 – 50В – 2,2мкФ (±20) % – ЕВАЯ.673541.054ТУ", Name="К50-97 – 50В – 2,2мкФ (±20) % – ЕВАЯ.673541.054ТУ", Type="Конденсатор электролитический"
DA1: "Микросхема MT3608", Input Voltage="2V to 24V", Manufacturer=AEROSEMI, Max Temperature=150°С, Min Temperature=-40°С, Output Voltage="Up to 28V", Package=SOT23-6, Country=Китай, Group=Микросхемы, Manufacturer Part Number="MT3608 AEROSEMI", Name=MT3608, Type="Импульсный повышающий преобразователь"
DD1: "Память Flash W25Q16JVSNIQ", Manufacturer=Winbond, Max Temperature=85°С, Min Temperature=-40°С, Package=SOIC-8, Supply Voltage=3,3V, Country=Тайвань, Group=Микросхемы, HelpURL=https://static.chipdip.ru/lib/136/DOC012136857.pdf, Manufacturer Part Number=W25Q16JVSNIQ, Name=W25Q16JVSNIQ, Notes="16Mb(2M x 8)", Type="Память Flash"
DD2: "Микроконтроллер К1948ВК018 АДКБ.431290.418ТУ", Manufacturer="АО «МИКРОН»", Max Temperature=85°С, Min Temperature=-45°С, Package=QFN40, Supply Voltage=3,3V, Country=Россия, Group=Микросхемы, HelpURL=https://mikron.ru/upload/docs/mcu/Information_AMUR_MIK32.pdf, Manufacturer Part Number="К1948ВК018 АДКБ.431290.418ТУ", Name="К1948ВК018 АДКБ.431290.418ТУ", Type=Микроконтроллер
FU1 FU2: "Предохранитель самовосстанавливающийся BSMD0603-010-15V", Manufacturer=BHFUSE, Package=SMD0603, Country=Китай, Group=Предохранители, HelpURL=https://static.chipdip.ru/lib/966/DOC042966016.pdf, I hold=0.1A, I trip=0.3A, Manufacturer Part Number="BSMD0603-010-15V BHFUSE", Name=BSMD0603-010-15V, Type="Предохранитель самовосстанавливающийся", V=15V
HL1: "Светодиод KP-1608SURC", Manufacturer=Kingbright, Package=SMD1608, Country=Тайвань, Group=Светодиоды, Manufacturer Part Number=KP-1608SURC, Max If=20mA, Max Vr=5V, Name=KP-1608SURC, Type=Светодиод
HL2: "Светодиод KPH-1608MGC", Manufacturer=Kingbright, Package=SMD1608, Country=Тайвань, Group=Светодиоды, Manufacturer Part Number=KPH-1608MGC, Max If=20mA, Max Vr=5V, Name=KPH-1608MGC, Type=Светодиод
HL3: "Светодиод KPH-1608SYC", Manufacturer=Kingbright, Package=SMD1608, Country=Тайвань, Group=Светодиоды, Manufacturer Part Number=KPH-1608SYC, Max If=20mA, Max Vr=5V, Name=KPH-1608SYC, Type=Светодиод
J1: library part NET_TIE_1MM, "Перемычка SMD NET_TIE_1MM", Group=Перемычки, Manufacturer Part Number=NET_TIE_1MM, Name=NET_TIE_1MM, Type="Перемычка SMD"
L1: library part LQH32CN100K33L, "Индуктивность 1210-0,45A-10мкГ ± 10%", Current=450mA, Manufacturer="Murata Electronics", Package=SMD1206, SRfreq=26MHz, Tolerance="± 10%", Country=Япония, Group=Индуктивности, Manufacturer Part Number=LQH32CN100K33L, Name=LQH32CN100K33L, Rdc=0.3Ohm, Type=Индуктивности
L2: library part UPZ2012U221-3R0TF, "Индуктивность ЭМП 0805-3A-220Ом ± 25% 100MHz", Current=3A, Manufacturer=Sunlord, Package=SMD0805, Tolerance=±25%, Country=Китай, Group=Индуктивности, HelpURL=https://static.chipdip.ru/lib/840/DOC012840723.pdf, Manufacturer Part Number=UPZ2012U221-3R0TF, Name=UPZ2012U221-3R0TF, Rdc=40mОm, Type="Дроссель ЭМП"
R1 R3 R4 R29: library part "Р1-12 - 0,1 - 1,2кОм ±1%", "Резистор Р1-12 - 0,1 - 1,2кОм ±1%", Manufacturer="АО «Ресурс»", Package=SMD0603, Power=0.1W, Tolerance="± 1%", Voltage=50V, Country=Россия, Group=Резисторы, HelpURL=https://aoresurs.com/upload/iblock/4b6/hnw668dxbiwjyxv0ejq9urcu5m58703r/Datasheet-R1_12-SHKAB.434110.024TU.pdf, Manufacturer Part Number="Р1-12 - 0,1 - 1,2кОм ±1%", Name="Р1-12 - 0,1 - 1,2кОм ±1%", Type=Резистор
R2 R5 R6 R17 R20 R21 R22 R26 R28 R30 R31 R32 R33 R34 R35 R36 R37: library part "Р1-12 - 0,1 - 10кОм ±1%", "Резистор Р1-12 - 0,1 - 10кОм ±1%", Manufacturer="АО «Ресурс»", Package=SMD0603, Power=0.1W, Tolerance="± 1%", Voltage=50V, Country=Россия, Group=Резисторы, HelpURL=https://aoresurs.com/upload/iblock/4b6/hnw668dxbiwjyxv0ejq9urcu5m58703r/Datasheet-R1_12-SHKAB.434110.024TU.pdf, Manufacturer Part Number="Р1-12 - 0,1 - 10кОм ±1%", Name="Р1-12 - 0,1 - 10кОм ±1%", Type=Резистор
R7 R11: library part "Р1-12 - 0603 - 0,05", "Перемычка Р1-12 - 0603 - 0,05", Manufacturer="АО «Ресурс»", Package=SMD0603, Power=3A, Country=Россия, Group=Резисторы, HelpURL=https://aoresurs.com/upload/iblock/b10/xo9xl0w0128k43psd6nz5q3kfcc2cprs/peremychka-R1_12-SHKAB.434110.025TU.pdf, Manufacturer Part Number="Р1-12 - 0603 - 0,05", Name="Р1-12 - 0603 - 0,05", Type=Перемычка
R8: library part "Р1-12 - 0,1 - 2кОм ±1%", "Резистор Р1-12 - 0,1 - 2кОм ±1%", Manufacturer="АО «Ресурс»", Package=SMD0603, Power=0.1W, Tolerance="± 1%", Voltage=50V, Country=Россия, Group=Резисторы, HelpURL=https://aoresurs.com/upload/iblock/4b6/hnw668dxbiwjyxv0ejq9urcu5m58703r/Datasheet-R1_12-SHKAB.434110.024TU.pdf, Manufacturer Part Number="Р1-12 - 0,1 - 2кОм ±1%", Name="Р1-12 - 0,1 - 2кОм ±1%", Type=Резистор
R9 R16: library part "Р1-12 - 0,1 - 10Ом ±1%", "Резистор Р1-12 - 0,1 - 10Ом ±1%", Manufacturer="АО «Ресурс»", Package=SMD0603, Power=0.1W, Tolerance="± 1%", Voltage=50V, Country=Россия, Group=Резисторы, HelpURL=https://aoresurs.com/upload/iblock/4b6/hnw668dxbiwjyxv0ejq9urcu5m58703r/Datasheet-R1_12-SHKAB.434110.024TU.pdf, Manufacturer Part Number="Р1-12 - 0,1 - 10Ом ±1%", Name="Р1-12 - 0,1 - 10Ом ±1%", Type=Резистор
R10 R12 R18 R19 R27: library part "Р1-12 - 0,1 - 4,7кОм ±1%", "Резистор Р1-12 - 0,1 - 4,7кОм ±1%", Manufacturer="АО «Ресурс»", Package=SMD0603, Power=0.1W, Tolerance="± 1%", Voltage=50V, Country=Россия, Group=Резисторы, HelpURL=https://aoresurs.com/upload/iblock/4b6/hnw668dxbiwjyxv0ejq9urcu5m58703r/Datasheet-R1_12-SHKAB.434110.024TU.pdf, Manufacturer Part Number="Р1-12 - 0,1 - 4,7кОм ±1%", Name="Р1-12 - 0,1 - 4,7кОм ±1%", Type=Резистор
R13: library part "Р1-12 - 0,1 - 11кОм ±1%", "Резистор Р1-12 - 0,1 - 11кОм ±1%", Manufacturer="АО «Ресурс»", Package=SMD0603, Power=0.1W, Tolerance="± 1%", Voltage=50V, Country=Россия, Group=Резисторы, HelpURL=https://aoresurs.com/upload/iblock/4b6/hnw668dxbiwjyxv0ejq9urcu5m58703r/Datasheet-R1_12-SHKAB.434110.024TU.pdf, Manufacturer Part Number="Р1-12 - 0,1 - 11кОм ±1%", Name="Р1-12 - 0,1 - 11кОм ±1%", Type=Резистор
R14: library part "Р1-12 - 0,1 - 1,5кОм ±1%", "Резистор Р1-12 - 0,1 - 1,5кОм ±1%", Manufacturer="АО «Ресурс»", Package=SMD0603, Power=0.1W, Tolerance="± 1%", Voltage=50V, Country=Россия, Group=Резисторы, HelpURL=https://aoresurs.com/upload/iblock/4b6/hnw668dxbiwjyxv0ejq9urcu5m58703r/Datasheet-R1_12-SHKAB.434110.024TU.pdf, Manufacturer Part Number="Р1-12 - 0,1 - 1,5кОм ±1%", Name="Р1-12 - 0,1 - 1,5кОм ±1%", Type=Резистор
R15: library part "Р1-12 - 0,125 - 150Ом ±1%", "Резистор Р1-12 - 0,125 - 150Ом ±1%", Manufacturer="АО «Ресурс»", Package=SMD0805, Power=0.125W, Tolerance="± 1%", Voltage=150V, Country=Россия, Group=Резисторы, HelpURL=https://aoresurs.com/upload/iblock/4b6/hnw668dxbiwjyxv0ejq9urcu5m58703r/Datasheet-R1_12-SHKAB.434110.024TU.pdf, Manufacturer Part Number="Р1-12 - 0,125 - 150Ом ±1%", Name="Р1-12 - 0,125 - 150Ом ±1%", Type=Резистор
R23 R24 R25: library part "Р1-12 - 0,1 - 470Ом ±1%", "Резистор Р1-12 - 0,1 - 470Ом ±1%", Manufacturer="АО «Ресурс»", Package=SMD0603, Power=0.1W, Tolerance="± 1%", Voltage=50V, Country=Россия, Group=Резисторы, HelpURL=https://aoresurs.com/upload/iblock/4b6/hnw668dxbiwjyxv0ejq9urcu5m58703r/Datasheet-R1_12-SHKAB.434110.024TU.pdf, Manufacturer Part Number="Р1-12 - 0,1 - 470Ом ±1%", Name="Р1-12 - 0,1 - 470Ом ±1%", Type=Резистор
VD1 VD2 VD4: "Диод ESD PESD5V0U1UT", Manufacturer="UTD Semiconductor", Package=SOT23-132, Country=Китай, Group=Диоды, Manufacturer Part Number=PESD5V0U1UT, Name=PESD5V0U1UT, Type="Сборка ESD диодов", Vrwm=5V
VD3: "Диод Шоттки 1N5817WS", Manufacturer=Hottech, Package=SOD-323, Country=Китай, Group=Диоды, Manufacturer Part Number="1N5817WS Hottech", Max If=1A, Max Vr=20V, Name=1N5817WS, Type="Диод Шоттки"
VT1 VT5: library part "КТ229Б9 АДКБ.432140.555 ТУ", "Транзистор КТ229Б9 АДКБ.432140.555 ТУ", Manufacturer="Кремний Эл", Package=SOT-23-132, Country=Россия, Group=Транзисторы, h21=100-250, HelpURL=https://group-kremny.ru/upload/iblock/c8e/c8e3c704764e7e34f4ed87f6430e15b8.pdf, Id/Ic=500mA, Manufacturer Part Number="КТ229Б9 АДКБ.432140.555 ТУ", Name=КТ229Б9, Struct=NPN, Type="Транзистор биполярный", Vds/Vce=45V
VT2 VT4 VT6: library part "КП526А9 АДКБ.432140.549 ТУ", "Транзистор КП546А9 АДКБ.432140.549", Manufacturer="Кремний Эл", Package=SOT-23-132, Country=Россия, Group=Транзисторы, Id/Ic=2, Manufacturer Part Number="КП526А9 АДКБ.432140.549 ТУ", Name=КП526А9, Struct=N-MOSFET, Type="Транзистор полевой", Vds/Vce=30V, Vth=1.45
VT3: "Транзистор  AO3401 Hottech", Manufacturer=Hottech, Package=SOT-23-132, Country=Китай, Group=Транзисторы, HelpURL=https://cdn.promelec.ru/upload/items/2023/12/08/AO3401%20SOT-23.pdf, Id/Ic=-4A, Manufacturer Part Number="AO3401 Hottech", Name=AO3401, Struct=P-MOSFET, Type="Транзистор полевой", Vds/Vce=-30V, Vth=-1.3V
XP1: "Соединитель DS1020-02-04MVT1R", Manufacturer=Connfly, Max Temperature=105°С, Min Temperature=-40°С, Nominal Voltage=250V, Country=Китай, Group=Соединители, Manufacturer Part Number=DS1020-02-04MVT1R, Name=DS1020-02-04MVT1R, Net_1=#ALERT_N, Net_2=BMC_SCLK, Net_3=GND, Net_4=BMC_SDA, Pins number=4, Rows=1, Type="Вилка угловая"
XP2: "Соединитель DS1069-3MVW6X", Manufacturer=Connfly, Max Temperature=85°С, Min Temperature=-25°С, Nominal current=3A, Nominal Voltage=250V, Country=Китай, Group=Соединители, Manufacturer Part Number=DS1069-3MVW6X, Name=DS1069-3MVW6X, Net_1=RX, Net_2=TX, Net_3=GND, Pins number=3, Rows=1, Type="Вилка прямая"
XP3: "Соединитель DS1013-10S", Manufacturer=Connfly, Max Temperature=105°С, Min Temperature=-40°С, Nominal current=1A, Nominal Voltage=500V, Country=Китай, Group=Соединители, Manufacturer Part Number=DS1013-10S, Name=DS1013-10S, Net_1=J_TCK, Net_2=GND, Net_3=J_TDO, Net_4=+3.3В, Net_5=J_TMS, Net_6=nRST, Net_7=+3.3В, Net_8=J_TRSTn, Net_9=J_TDI, Net_10=GND, Pins number=10, Rows=2, Type="Вилка прямая"
XP4: "Соединитель DS1020-02-03MVT1R", Manufacturer=Connfly, Max Temperature=105°С, Min Temperature=-40°С, Nominal Voltage=250V, Country=Китай, Group=Соединители, Manufacturer Part Number=DS1020-02-03MVT1R, Name=DS1020-02-03MVT1R, Net_1="+3.3 В", Net_2=PWR_ON, Net_3=GND, Pins number=3, Rows=1, Type="Вилка угловая"
XP5 XP6: "Соединитель DS1020-02-05MVT1R", Manufacturer=Connfly, Max Temperature=105°С, Min Temperature=-40°С, Nominal Voltage=250V, Country=Китай, Group=Соединители, Manufacturer Part Number=DS1020-02-05MVT1R, Name=DS1020-02-05MVT1R, Net_2=GND, Net_4=SDA, Pins number=5, Rows=1, Type="Вилка угловая"
  XP5: Net_1=+3.3V, Net_3=SCLK, Net_5=Pin_GND
  XP6: Net_1=+3.3В, Net_3=SLCK, Net_5=Pin_3V3
XP7: "Соединитель S6B-ZR-SM4A-TF", Manufacturer=JST, Max Temperature=85°С, Min Temperature=-25°С, Nominal current=1A, Nominal Voltage=50V, Country=Япония, Group=Соединители, Manufacturer Part Number=S6B-ZR-SM4A-TF, Name=S6B-ZR-SM4A-TF, Net_1=V_LED, Net_2=LED_GND, Net_3=LED, Net_4=GND_S, Net_5=Vo, Net_6=Vcc, Pins number=6, Rows=1, Type="Вилка угловая"
ZQ1: library part SJK-7U-32.000-10-10-40-C-10, "Резонатор кварцевый SJK-7U-32.000-10-10-40-C-10", Load Capacity=10pF, Manufacturer=SJK, Package=SMD32x25x07, Tolerance=±30ppm, Country=Китай, ESR=60Ohm, Freq=32MHz, Group=Кварцы, HelpURL=https://static.chipdip.ru/lib/087/DOC053087027.pdf, Manufacturer Part Number=SJK-7U-32.000-10-10-40-C-10, Name=SJK-7U-32.000-10-10-40-C-10, Type="Кварцевый резонатор"

## Free pads (board coordinates)
  round 0 hole 3.3 unplated: MH(3,3) MH(3,42) MH(67,3) MH(67,42)
  round 1 smd paste-2539.97 mask+0.8: RP(9.5,13) RP(61,4) RP(64,37)

## Via types
v1: diameter 0.7, hole 0.3, Top Layer to Bottom Layer, tented both sides, 198 vias
v2: diameter 0.7/0.7 (per signal layer), hole 0.3, Top Layer to Bottom Layer, tented both sides, 99 vias

## Nets (pads, with @x,y where several pads share a name; then routed paths per layer and width w, separated by ;. In a path a pad name is that pad's centre, name@x,y a point inside that pad or via, vN(x,y) a via of type N, cw(c..) or ccw(c..) an arc to the next point about the centre after c; other vN are vias at no path point)
+3V3: C5.2 C7.2 C12.2 C16.2 C19.2 C21.2 C24.1 DA1.4 DA1.5 DD1.8 DD2.5 DD2.19 DD2.20 DD2.52 FU2.1 HL1.1 HL2.1 HL3.1 L1.1 L2.2 R10.2 R12.2 R18.2 R19.2 R22.1 R26.2 R28.2 R30.2 R31.2 VT2.1 VT3.3 VT4.1 XP3.4 XP3.7 | length 73.8
  Top Layer w0.2: v1(17.7,33.2) 17.7,33.133 17.4,32.833 17.4,32 17.842,31.558 18.392,31.558 18.45,31.5 R22.1 18.45,29.6 R28.2 R30.2@18.45,27.7 ; R26.2 26.65,30.25 27.405,31.005 DD1.8 DD1.8@28.233,31.097 ; C5.2@27.27,33.117 C5.2 ; 29.228,33.084 29.228,32.272 29.6,31.9 R31.2 ; v1@32.865,36.1 v1(33,36.1) ; 32.975,15.375 33.918,16.318 DD2.52 ; L2.2@34.995,12.3 L2.2 ; DD2.20 37.518,26.4 37.999,26.881 38.181,26.881 ; DD2.19 37.918,26.618 ; DD2.5 40.634,19.7 40.834,19.5 41.501,19.5 41.618,19.383 41.618,19.35
  Top Layer w0.3: HL2.1 HL1.1 11.175,24.853 11.175,23.725 v1(11.2,23.7) ; VT2.1 16.214,18.314 18.116,18.314 R10.2 18.13,17.346 17.836,17.053 v1(17.836,16.864) 18.5,16.2 VT4.1@18.5,15.531 ; VT4.1 20.092,15.408 20.65,14.85 R12.2 R12.2@20.642,14.908
  Top Layer w0.4: v1@52.7,17.95 v1(52.7,17.9) ; 52.75,18.35 52.75,17.95 v1(52.7,17.9) ; FU2.1@54.13,16.3 54.128,16.302 53.034,16.302 52.7,16.636 v1(52.7,17.9)
  Top Layer w0.5: C5.2@27.27,33.117 27.27,32.451 28.233,31.488 DD1.8@28.233,31.097 ; C5.2@27.287,33.084 29.228,33.084 30.406,34.262 30.406,35.4 C24.1 ; v1@32.8,12.3 32.8,12.354 32.975,12.529 32.975,15.375 ; v1@32.975,12.3 L2.2@34.995,12.3 ; 41.618,19.35 43.286,17.682 44.225,17.682 44.243,17.7 C19.2 ; v1(52.7,18.8) 52.75,18.75 52.75,18.35 ; v1@52.75,18.8 52.8,18.85 R18.2 ; R19.2@52.8,25.6 v1(52.8,26.9)
  Top Layer w0.7: 37.918,26.618 38.181,26.881 38.256,26.881 39.025,27.65 C16.2 C12.2 C7.2 39.025,33.675 v1(38.8,33.9) ; v1(44.418,16.4) 44.418,17.55 44.425,17.557 C19.2 ; C19.2@44.434,17.691 C19.2@44.443,17.7
  Top Layer w1: C24.1 32.565,35.8 v1@32.865,36.1
  other v1: 31.9,11.246 32.8,11.246 31.9,12.4 32.8,12.4 16.5,33.2 18.9,33.2 16.5,34.5 17.7,34.5 18.891,34.501 38.8,35 38.8,36.1 38.8,37.2 33,37.3 33,38.5
+3V3_Fus: FU2.2 XP5.1 XP6.1 XP6.5 | length 31.7
  Top Layer w0.3: v1(56.9,16.3) 61.3,11.9 XP6.1@64.1,11.9 ; v1(60.9,21.6) 60.9,17.5 61.5,16.9 XP6.5@64.1,16.9
  Top Layer w0.32: v1(60.9,21.6) 60.9,24.7 62.1,25.9 XP5.1@64.05,25.9
  Top Layer w0.4: FU2.2@55.47,16.3 v1(56.9,16.3)
  Bottom Layer w0.4: v1(56.9,16.3) 60.9,20.3 v1(60.9,21.6)
+5V: C2.1 FU1.1 R13.2 VD3.2 | length 79.2
  Top Layer w0.5: v1(29.454,3.85) 29.477,3.873 29.477,5.407 FU1.1@29.5,5.43
  Top Layer w0.7: R13.2 22.33,38.55 23.48,37.4 25.4,37.4 25.9,36.9 25.9,35.794 25.706,35.6 24.6,35.6 24.02,35.02 VD3.2 ; C2.1@25.806,35.7 v1(27.4,35.7)
  Bottom Layer w0.7: v1(27.4,35.7) 15.41,35.7 13.5,33.79 13.5,13.8 9.4,9.7 9.4,3.9 10.8,2.5 28.104,2.5 v1(29.454,3.85)
+5V_Fus: FU1.2 R15.1 XP7.6 | length 29.2
  Top Layer w0.5: FU1.2@29.5,6.77 29.502,6.773 31.798,6.773 R15.1 31.813,6.788 v1(33.587,6.788) ; v1@55.425,4.225 XP7.6
  Bottom Layer w0.5: v1@33.487,6.788 33.487,6.733 36.021,4.2 v1(55.4,4.2)
AGND: C6.1 C11.1 DD2.63 J1.1 R29.1 XP7.4
BMC_ALERT_MCU: DD2.49 R1.2 | length 4.9
  Top Layer w0.2: R1.2 29.458,15.508 29.458,16.058 29.6,16.2 32.5,16.2 32.718,16.418 DD2.49
BMC_SCLK_MCU: DD2.47 R7.1 R10.1 VT2.2 | length 20.1
  Top Layer w0.2: R7.1 16.15,20.25 VT2.2 16.283,20.117 16.883,20.117 17.372,19.628 R10.1 18.146,19.612 18.788,19.612 19.3,19.1 19.3,17.9 20.2,17 28.351,17 29.851,18.5 DD2.47
BMC_SDA_MCU: DD2.48 R11.1 R12.1 VT4.2 | length 21.4
  Top Layer w0.2: R11.1 14.8,14.65 15.558,15.408 VT4.2 16.569,15.208 17.527,14.25 19,14.25 19.7,13.55 R12.1 21.45,13.55 21.8,13.9 21.8,16.1 22.3,16.6 28.7,16.6 30.2,18.1 DD2.48
BOOT0: DD2.17 R32.1 R33.2 | length 16.1
  Top Layer w0.2: DD2.17 38.718,25.853 39.092,26.226 41.226,26.226 43.4,28.4 43.4,35.106 43.75,35.456 44.4,35.456 R33.2
  Top Layer w0.3: 44.4,35.456 R32.1@44.4,36.325
BOOT1: DD2.18 R36.1 R37.2 | length 16.1
  Top Layer w0.2: DD2.18 38.318,26.018 38.926,26.626 41.026,26.626 43,28.6 43,35.206 42.75,35.456 42.1,35.456
  Top Layer w0.3: R37.2 42.1,35.456 R36.1
DUST_SNS_B: VT6.3 XP7.3 | length 3.1
  Top Layer w0.5: VT6.3 50,8.85 50.925,7.925 XP7.3
DUST_SNS_LED_CTRL: DD2.58 R16.1 | length 12.2
  Top Layer w0.2: DD2.58 36.318,16.035 36.618,15.735 v1(36.618,15.6) ; v1(43.8,11) 45.15,11 R16.1
  Bottom Layer w0.2: v1(36.618,15.6) 39.2,15.6 v1(43.8,11)
DUST_SNS_V: C4.2 R27.1 XP7.5 | length 4.7
  Top Layer w0.2: XP7.5 53.925,9.046 54.135,9.256 R27.1
DUST_SNS_V_MCU: C6.2 DD2.54 R27.2 R29.2 | length 30.3
  Top Layer w0.2: DD2.54 34.718,16.088 35.018,15.788 v1(35.018,15.6) ; R27.2 55.435,12.585 R29.2@55.625,12.775 ; R29.2 55.475,12.625 55.475,14.4 v1(56.9,14.4)
  Bottom Layer w0.2: v1(35.018,15.6) 35.102,15.684 35.102,16.035 35.667,16.6 40.1,16.6 42.3,14.4 v1(56.9,14.4)
GND: C1.2 C2.2 C3.2 C4.1 C5.1 C7.1 C8.1 C9.1 C10.1 C12.1 C13.1 C14.1 C15.2 C16.1 C17.2 C18.1 C19.1 C20.1 C21.1 C22.1 C23.1 C24.2 DA1.2 DD1.4 DD2.9 DD2.13 DD2.29 DD2.59 DD2.65 J1.2 R2.1 R5.1 R8.2 R14.1 R17.1 R20.2 R21.1 R24.2 R33.1 R37.1 VD1.3 VD2.3 VD4.3 VT1.2 VT5.2 VT6.2 XP1.3 XP2.3 XP3.2 XP3.10 XP4.3 XP5.2 XP6.2 XP7.2 ZQ1.2 ZQ1.4 | length 4.8
  Top Layer w0.2: v1(31.115,29.665) 31.115,29.61 31.5,29.226 31.5,28.464 R21.1 ; DD2.13 41.4,22.9 v1@42.4,23.9 ; R33.1 R33.1@44.5,33.256 ; v1(49.1,13) v1@49.15,12.95
  other v1: 7.5,1 10.5,1 13.5,1 16.5,1 19.5,1 22.5,1 25.5,1 28.5,1 31.5,1 34.5,1 37.5,1 40.5,1 43.5,1 46.5,1 49.5,1 55.5,1 58.5,1 48.5,3 50.5,3 25,5.5 26.5,5.5 25,7.3 26.5,7.3 25,8.9 26.5,8.9 69,9 19.6,10.3 21.3,10.3 30.4,11 69,12 26.2,12.5 21.8,12.6 43.5,13 45.5,13 47.3,13 30.6,13.3 60.4,14.4 1,15 69,15 59.4,15.4 12.5,16.25 56.6,17.4 3.5,17.7 1,18 69,18 49.5,18.2 12.5,18.25 20.4,18.4 60.1,18.4 34.218,19.6 35.718,19.6 37.218,19.6 49.5,19.9 24,20.1 12.5,20.25 56.3,20.3 48,20.5 1,21 69,21 34.218,21.1 35.718,21.1 37.218,21.1 3.5,21.3 49.5,21.6 48,22.5 34.218,22.6 35.718,22.6 37.218,22.6 49.5,23.3 58.5,23.3 42.2,23.8 1,24 69,24 43.2,24.5 58.5,24.5 43.2,25.5 8.741,25.788 16.6,26.2 61.1,26.8 57,26.9 1,27 69,27 42,28.6 25.4,29.05 16.2,29.3 53.01,29.29 55,29.3 57,29.3 1,30 69,30 44.5,30.2 33.9,30.5 42,30.6 2,31.5 3,31.5 4,31.5 44.5,31.7 46,31.7 33,31.8 42,32.2 34.1,32.7 14.5,32.9 1,33 69,33 2,33.5 3,33.5 4,33.5 40.6,33.7 34.1,34 7.5,34.5 40.6,34.8 40.6,35.9 1,36 69,36 10.4,36.4 22.2,36.7 19.1,41 7.5,44 10.5,44 13.5,44 16.5,44 19.5,44 22.5,44 25.5,44 28.5,44 31.5,44 34.5,44 37.5,44 40.5,44 43.5,44 46.5,44 49.5,44 52.5,44 55.5,44 58.5,44
  other v2: 8.75,1 21.25,1 23.75,1 36.25,1 38.75,1 51.25,1 53.75,1 61.25,1 7.5,3.5 12.5,3.5 17.5,3.5 20,3.5 22.5,3.5 25,3.5 27.5,3.5 32.5,3.5 35,3.5 6.25,6 46.25,6 58.75,6 61.25,6 63.75,6 2.5,8.5 5,8.5 7.5,8.5 27.5,8.5 35,8.5 37.5,8.5 40,8.5 42.5,8.5 45,8.5 47.5,8.5 60,8.5 62.5,8.5 8.75,11 26.25,11 28.75,11 61.25,11 63.75,11 7.5,13.5 57.5,13.5 67.5,13.5 1.25,16 6.25,16 8.75,16 58.75,16 66.25,16 2.5,18.5 47.5,18.5 62.5,18.5 18.75,21 23.75,21 58.75,21 63.75,21 7.5,23.5 10,23.5 12.5,23.5 17.5,23.5 62.5,23.5 15,23.525 1.25,26 3.75,26 51.25,26 56.25,26 58.75,26 66.25,26 7.5,28.5 10,28.5 47.5,28.5 52.5,28.5 67.5,28.5 1.25,31 26.25,31 51.25,31 66.25,31 32.5,33.5 50,33.5 60,33.5 62.5,33.5 28.75,36 53.75,36 58.75,36 61.25,36 66.25,36 7.5,38.5 62.5,38.5 11.25,41 28.75,41 36.25,41 38.75,41 41.25,41 43.75,41 46.25,41 48.75,41 51.25,41 53.75,41 56.25,41 58.75,41 61.25,41
JTAG_TCK: DD2.45 XP3.1 | length 17.7
  Top Layer w0.2: v1(26.9,18) 28.2,19.3 30.265,19.3 DD2.45
  Bottom Layer w0.2: XP3.1 22.7,7.9 22.7,13.8 v1(26.9,18)
JTAG_TDI: DD2.46 XP3.9 | length 25.3
  Top Layer w0.2: v1(28.1,18) 29,18.9 DD2.46
  Bottom Layer w0.2: XP3.9 12.24,7.859 23.481,19.1 27,19.1 v1(28.1,18)
JTAG_TDO: DD2.42 XP3.3 | length 36.1
  Top Layer w0.2: v1(23.3,18) 25.8,20.5 29.768,20.5 DD2.42
  Bottom Layer w0.2: XP3.3 19.597,7.337 18.937,7.337 17.9,6.3 16.8,6.3 16,5.5 16,4.2 15.606,3.806 14.194,3.806 14.135,3.865 13.5,4.5 13.5,8.2 v1(23.3,18)
JTAG_TMS: DD2.44 XP3.5 | length 20.7
  Top Layer w0.2: v1(25.7,18) 27.4,19.7 30.099,19.7 ; 30.099,19.7 DD2.44
  Bottom Layer w0.2: XP3.5 17.3,7.62 17.3,9.6 v1(25.7,18)
JTAG_TRSTn: DD2.43 XP3.8 | length 25.1
  Top Layer w0.2: v1(24.5,18) 26.6,20.1 29.934,20.1 DD2.43
  Bottom Layer w0.2: XP3.8 14.78,5.082 16,6.302 16,9.5 v1(24.5,18)
LED_R_MCU: DD2.30 R23.2 | length 28
  Top Layer w0.2: v1(33.1,26.7) 33.518,26.282 DD2.30
  Top Layer w0.3: R23.2 15.774,24.9 v1(17.2,24.9)
  Bottom Layer w0.2: v1(17.2,24.9) 19.7,27.4 19.7,30.8 21.3,32.4 29.7,32.4 33.1,29 v1(33.1,26.7)
LED_Y_MCU: DD2.27 R25.2 | length 26.7
  Top Layer w0.2: v1(34.4,26.7) 34.4,26.651 34.718,26.333 DD2.27@34.718,25.3
  Top Layer w0.3: R25.2 15.774,27.8 v1(17,27.8)
  Bottom Layer w0.2: v1(17,27.8) 17,28.836 21.164,33 30.1,33 34.35,28.75 34.35,26.75 v1(34.4,26.7)
NetC1_1: C1.1 R6.2 VT3.2 XP4.1 | length 13.1
  Top Layer w0.5: XP4.1 6,34.9 9.083,37.983 9.9,37.983 13.307,37.983 R6.2@13.6,38.276 ; VT3.2 13.4,40.05 13.525,40.05 13.575,40 13.575,38.301 R6.2@13.6,38.276 ; R6.2 13.65,38.226 R6.2@13.6,38.276
NetC3_1: C3.1 R15.2 XP7.1 | length 17.7
  Top Layer w0.5: R15.2 31.812,5.013 34.888,5.013 C3.1 37.1,5 ; 37,5 39,7 47.8,7 47.925,6.875 XP7.1
NetC8_2: C8.2 DD2.40 ZQ1.1 | length 13.4
  Top Layer w0.2: C8.2@22.458,20 22.458,21.258 22.7,21.5 ZQ1.1 22.7,22.5 24.8,22.5 25.6,23.3 26.9,23.3 27.3,22.9 27.3,22 28,21.3 DD2.40
NetC9_2: C9.2 DD2.41 | length 5.7
  Top Layer w0.2: C9.2@26.4,21.525 C9.2 27.1,21.5 27.7,20.9 DD2.41
NetC10_2: C10.2 C15.1 DD2.24 | length 6.8
  Top Layer w0.2: DD2.24 35.918,26.218
  Top Layer w0.7: C15.1 35.6,31.4 35.6,29.515 36.05,29.065 36.05,28.5 C10.2 36.075,28.325 36.075,26.375 35.918,26.218
NetC11_2: C11.2 DD2.62 L2.1 | length 6.3
  Top Layer w0.2: DD2.62 37.918,13.994 C11.2@38.018,13.895
  Top Layer w0.5: L2.1 C11.2@38.015,13.891
NetC13_2: C13.2 C17.1 DD2.11 | length 9.3
  Top Layer w0.2: DD2.11 41.2,22.1 41.6,22.5 41.9,22.5
  Top Layer w0.5: 41.9,22.5 42.2,22.5 43.1,23.4 44.325,23.4 C13.2
  Top Layer w0.7: C13.2 44.443,23.318 44.443,25.675 45.368,26.6 C17.1
NetC14_2: C14.2 DD2.39 ZQ1.3 | length 15
  Top Layer w0.2: C14.2 19.008,23.783 19.483,23.783 20.3,24.6 ZQ1.3@21,24.6 ; ZQ1.3@21.4,23.9 22,23.3 24.9,23.3 25.4,23.8 27.2,23.8 27.7,23.3 27.7,22.2 28.2,21.7 DD2.39
NetC18_2: C18.2 DD2.6 | length 5
  Top Layer w0.2: DD2.6 42,20.1
  Top Layer w0.5: 42,20.1 42.5,19.6 C18.2
NetC23_2: C23.2 DD2.15 R35.2 | length 18.1
  Top Layer w0.2: DD2.15 40.5,23.7 41,24.2 41,25.4 47.5,31.9 47.5,35.206 47.188,35.519 46.5,35.519 C23.2
  Top Layer w0.3: 46.5,35.519 R35.2
NetDA1_1: DA1.1 L1.2 VD3.1 | length 7.1
  Top Layer w0.5: DA1.1 20.375,40.05 20.35,40.025 20.35,37.1 L1.2 20.25,34.55 20.7,34.1 VD3.1
NetDA1_3: DA1.3 R13.1 R14.2 | length 4
  Top Layer w0.5: DA1.3 20.475,41.975 22.225,41.975 R14.2 22.265,41.985 22.265,39.865 R13.1
NetDD1_1: DD1.1 DD2.37 R22.2 | length 20.8
  Top Layer w0.2: R22.2 20.681,31.4 21.123,30.958 v1(21.2,30.958) 21.224,30.981 22.851,30.981 DD1.1 ; v1(29.6,22.9) 29.719,22.9 30.119,22.5 DD2.37
  Bottom Layer w0.2: v1(21.2,30.958) 21.2,30.859 20.15,29.809 20.15,27.75 22.4,25.5 26.419,25.5 28.95,22.969 29.531,22.969 v1(29.6,22.9)
NetDD1_2: DD1.2 DD2.35 R28.1 | length 19.3
  Top Layer w0.2: R28.1 20.765,29.5 21.065,29.8 v1(21.2,29.8) 21.233,29.767 22.842,29.767 DD1.2 DD1.2@22.342,29.735 ; R28.1@19.75,29.6 R28.1@19.95,29.4 ; v1(29.6,24.6) 29.6,24.5 30.8,23.3 DD2.35
  Bottom Layer w0.2: v1(21.2,29.8) 20.55,29.15 20.55,28.231 22.681,26.1 26.6,26.1 28.1,24.6 v1(29.6,24.6)
NetDD1_3: DD1.3 DD2.34 R30.1 | length 16.6
  Top Layer w0.2: R30.1 20.455,27.6 20.888,28.034 20.888,28.053 21.2,28.365 v1(21.2,28.5) 21.218,28.482 22.858,28.482 DD1.3 ; v1(29.6,25.9) 29.735,25.9 30.5,25.135 30.5,24.344 31.144,23.7 DD2.34
  Bottom Layer w0.2: v1(21.2,28.5) 23,26.7 26.831,26.7 27.548,25.983 29.517,25.983 v1(29.6,25.9)
NetDD1_5: DD1.5 DD2.36 R26.1 | length 7.5
  Top Layer w0.2: DD1.5 28.185,27.195 28,27.01 28,25.25 R26.1 27.95,24.45 28.7,23.7 29.8,23.7 30.6,22.9 DD2.36
NetDD1_6: DD1.6 DD2.38 R21.2 | length 14.1
  Top Layer w0.2: DD1.6 30.199,28.465 R21.2 30.2,28.438 v1(30.2,27.1) ; v1(28.5,22.5) 28.619,22.5 29.019,22.1 DD2.38
  Bottom Layer w0.2: v1(28.5,22.5) 29,22 30.088,22 30.7,22.612 30.7,26.6 v1(30.2,27.1)
NetDD1_7: DD1.7 DD2.33 R31.1 | length 12.4
  Top Layer w0.2: DD1.7 29.385,29.735 30.45,30.8 31.05,30.8 31.55,31.3 ; R31.1 31.55,31.3 ; DD2.33 31.793,26.993 32.5,27.7 32.5,30.35 31.55,31.3
NetHL1_2: HL1.2 R23.1 | length 1.8
  Top Layer w0.3: HL1.2 R23.1
NetHL2_2: HL2.2 R24.1 | length 1.9
  Top Layer w0.3: HL2.2 12.772,30.578 14.352,30.578 R24.1
NetHL3_2: HL3.2 R25.1 | length 1.8
  Top Layer w0.3: HL3.2 14.43,27.8 R25.1
NetR1_1: R1.1 R2.2 VT1.1 | length 4
  Top Layer w0.2: VT1.1 R1.1 R2.2
NetR3_1: R3.1 XP2.1 | length 6.6
  Top Layer w0.2: R3.1 51.45,37.85 52.879,39.279 XP2.1
NetR4_1: R4.1 XP4.2 | length 3.5
  Top Layer w0.3: XP4.2 7.132,31.768 8.2,30.7 R4.1
NetR4_2: R4.2 R5.2 VT5.1 | length 4.2
  Top Layer w0.3: R4.2 R5.2 10,33.9 10.6,33.3 VT5.1
NetR6_1: R6.1 R9.1 VT3.1 | length 6.6
  Top Layer w0.3: VT3.1 13.493,41.95 13.643,41.8 13.643,41.457 15,40.1 15,38.1 R9.1
NetR7_2: R7.2 VD1.1 VT2.3 XP1.2 | length 13.3
  Top Layer w0.2: VD1.1@9.115,19.3 10.2,19.3 12.9,22 R7.2 14.75,21.9 14.75,21.25 13.8,20.3 VT2.3
  Top Layer w0.25: XP1.2 7.8,19.7 8.2,19.3 9.05,19.3 VD1.1
NetR9_2: R9.2 VT5.3 | length 3.3
  Top Layer w0.3: VT5.3 13.1,35.7 13.925,34.875 14.975,34.875 R9.2
NetR11_2: R11.2 VD1.2 VT4.3 XP1.4 | length 13
  Top Layer w0.2: VD1.2@9.233,17.217 10.233,17.217 14.092,13.358 14.742,13.358 R11.2 16.4,13.35 16.742,13.008 VT4.3
  Top Layer w0.25: XP1.4 VD1.2@8.95,17.2
NetR16_2: R16.2 R17.2 VT6.1 | length 6.5
  Top Layer w0.2: R16.2@45.2,9.65 45.4,9.65 47.204,9.65 48.9,9.65 50.467,11.217 50.75,11.217 50.95,11.417 VT6.1
NetR20_1: R20.1 XP5.5 | length 3.6
  Top Layer w0.2: R20.1@60.556,30.9 R20.1@60.606,30.85
  Top Layer w0.32: R20.1@60.606,30.85 XP5.5@64.1,30.85
NetVT1_3: VT1.3 XP1.1 | length 28.8
  Top Layer w0.3: XP1.1 6,21.927 6.473,22.4 v1(8.3,22.4) ; v1(10.1,15.3) 13.9,11.5 24.294,11.5 24.9,12.106 VT1.3
  Bottom Layer w0.3: v1(8.3,22.4) 10.1,20.6 v1(10.1,15.3)
nRST_MCU: C22.2 DD2.14 R34.2 XP3.6 | length 55.5
  Top Layer w0.2: DD2.14 40.7,23.3 41.666,24.266 41.666,25.492 47.9,31.726 47.9,35.206 48.163,35.469 48.9,35.469 C22.2
  Top Layer w0.3: 48.9,35.469 R34.2@48.9,36.256
  Bottom Layer w0.25: XP3.6 17.32,5.082 18.538,6.3 23.5,6.3 23.8,6.6 23.8,12.5 32.9,21.6 32.9,23 34.866,24.966 v1(41.666,24.966)
TEMP_I2C_SCLK: DD2.64 R18.1 VD4.2 XP5.3 XP6.3 | length 51.8
  Top Layer w0.2: DD2.64 40.625,17.175 42.55,15.25 49.45,15.25 51.4,17.2 51.4,21.9 51.95,22.45 R18.1 54.6,22.45 VD4.2
  Top Layer w0.3: 59.5,27.5 59.5,23.1 58.75,22.35 VD4.2 54.7,18.7 55.1,18.3 58,18.3 61.9,14.4 XP6.3@64.1,14.4
  Top Layer w0.32: 59.5,27.5 60.35,28.35 XP5.3@64.1,28.35
TEMP_I2C_SDA: DD2.1 R19.1 VD4.1 XP5.4 XP6.4 | length 56.5
  Top Layer w0.2: DD2.1 40.418,18.1 42.818,15.7 49.2,15.7 51,17.5 51,23.4 51.85,24.25 R19.1 VD4.1@54.6,24.25 ; v1(54.6,26.9) 54.6,24.35 VD4.1
  Top Layer w0.3: VD4.1 56.25,24.25 58,26 58,28 ; v1(56.3,19) 58.3,19 61.6,15.7 XP6.4@64.05,15.7
  Top Layer w0.32: 58,28 59.6,29.6 XP5.4@64.1,29.6
  Bottom Layer w0.2: v1(54.6,26.9) 54.6,20.1 55.65,19.05 56.25,19.05 v1(56.3,19)
UART_RX_MCU: DD2.7 R3.2 R8.1 VD2.2 | length 28.7
  Top Layer w0.2: DD2.7 41.5,20.5 41.85,20.85 42.55,20.85 v1(42.6,20.8) ; R8.1 R3.2 VD2.2 54.9,34.55 v1(54.9,35.9)
  Bottom Layer w0.2: v1(42.6,20.8) 42.619,20.8 54.817,32.998 54.817,35.817 v1(54.9,35.9)
UART_TX_MCU: DD2.4 VD2.1 XP2.2 | length 34.6
  Top Layer w0.2: DD2.4 40.468,19.3 v1(42.418,17.35) ; XP2.2 56.85,39.068 VD2.1 v1(58.5,34.5)
  Bottom Layer w0.2: v1(42.418,17.35) 42.4,17.368 42.4,19.6 57.3,34.5 v1(58.5,34.5)
VCC_BU: C20.2 DD2.10 R32.2 R34.1 R35.1 R36.2 | length 33.1
  Top Layer w0.2: DD2.10 41.7,21.7
  Top Layer w0.3: R36.2 42.106,37.656 44.369,37.656 44.394,37.656 R32.2 ; R32.2@44.431,37.656 R35.1 R34.1 v1(48.9,39.1)
  Top Layer w0.5: 41.7,21.7 v1@42.654,21.7 ; v1(42.6,21.7) 44.225,21.7 C20.2
  Bottom Layer w0.3: v1(42.6,21.7) 48.9,28 v1(48.9,39.1)
pads on no net: DA1.6 DD2.2 DD2.3 DD2.8 DD2.12 DD2.16 DD2.21 DD2.22 DD2.23 DD2.25 DD2.26 DD2.28 DD2.31 DD2.32 DD2.50 DD2.51 DD2.53 DD2.55 DD2.56 DD2.57 DD2.60 DD2.61 XP1.M XP4.M XP5.M XP6.M XP7.M

## Polygon pours and split planes (outlines as drawn)
GND on Top Layer "GND_L01_P029" (solid, pour order 29): 0,45 0,0 69.5,0 69.5,45
AGND on Top Layer "Top Layer-AGND" (solid, pour order 28): 34.93,9.1 41.2,9.1 41.2,12.1 43,13.9 49.7,13.9 51.9,11.7 51.9,4.9 52.9,4.9 52.9,11.6 54.45,11.6 54.8,11.95 54.8,15.4 54.1,16.1 51.8,16.1 50.5,14.8 41.9,14.8 40.3,16.4 38.499,16.401 38.5,16.498 38.215,16.5 38.215,15 39,15 39,13 36.2,13 36.2,10.2 34.93,10.2
+3V3 on Top Layer "+3V3_L01_P026" (solid, pour order 26): 15.4,42.7 15.4,32.6 19.505,32.6 19.495,35.098 18.702,35.098 18.4,35.4 18.4,42.7
+3V3 on Top Layer "+3V3_L01_P027" (solid, pour order 27): 39.5,37.8 38,37.8 38,33.014 39.5,33.014 39.5,36.3 39.5,37
+3V3 on Top Layer "+3V3_L01_P024" (solid, pour order 24): 32.3,35.5 33.9,35.5 33.9,39.1 32.3,39.1
+3V3 on Top Layer "+3V3_L01_P025" (solid, pour order 25): 31.3,12 31.3,12.5 31.3,13.1 33.5,13.1 33.5,10.6 31.3,10.6
GND on Bottom Layer "GND_L04_P030" (solid, pour order 30): 0,45 0,0 69.5,0 69.5,45